# EAGLE board Index Registers - 1.1 (EAGLE 9.6.2), part 1 of 2
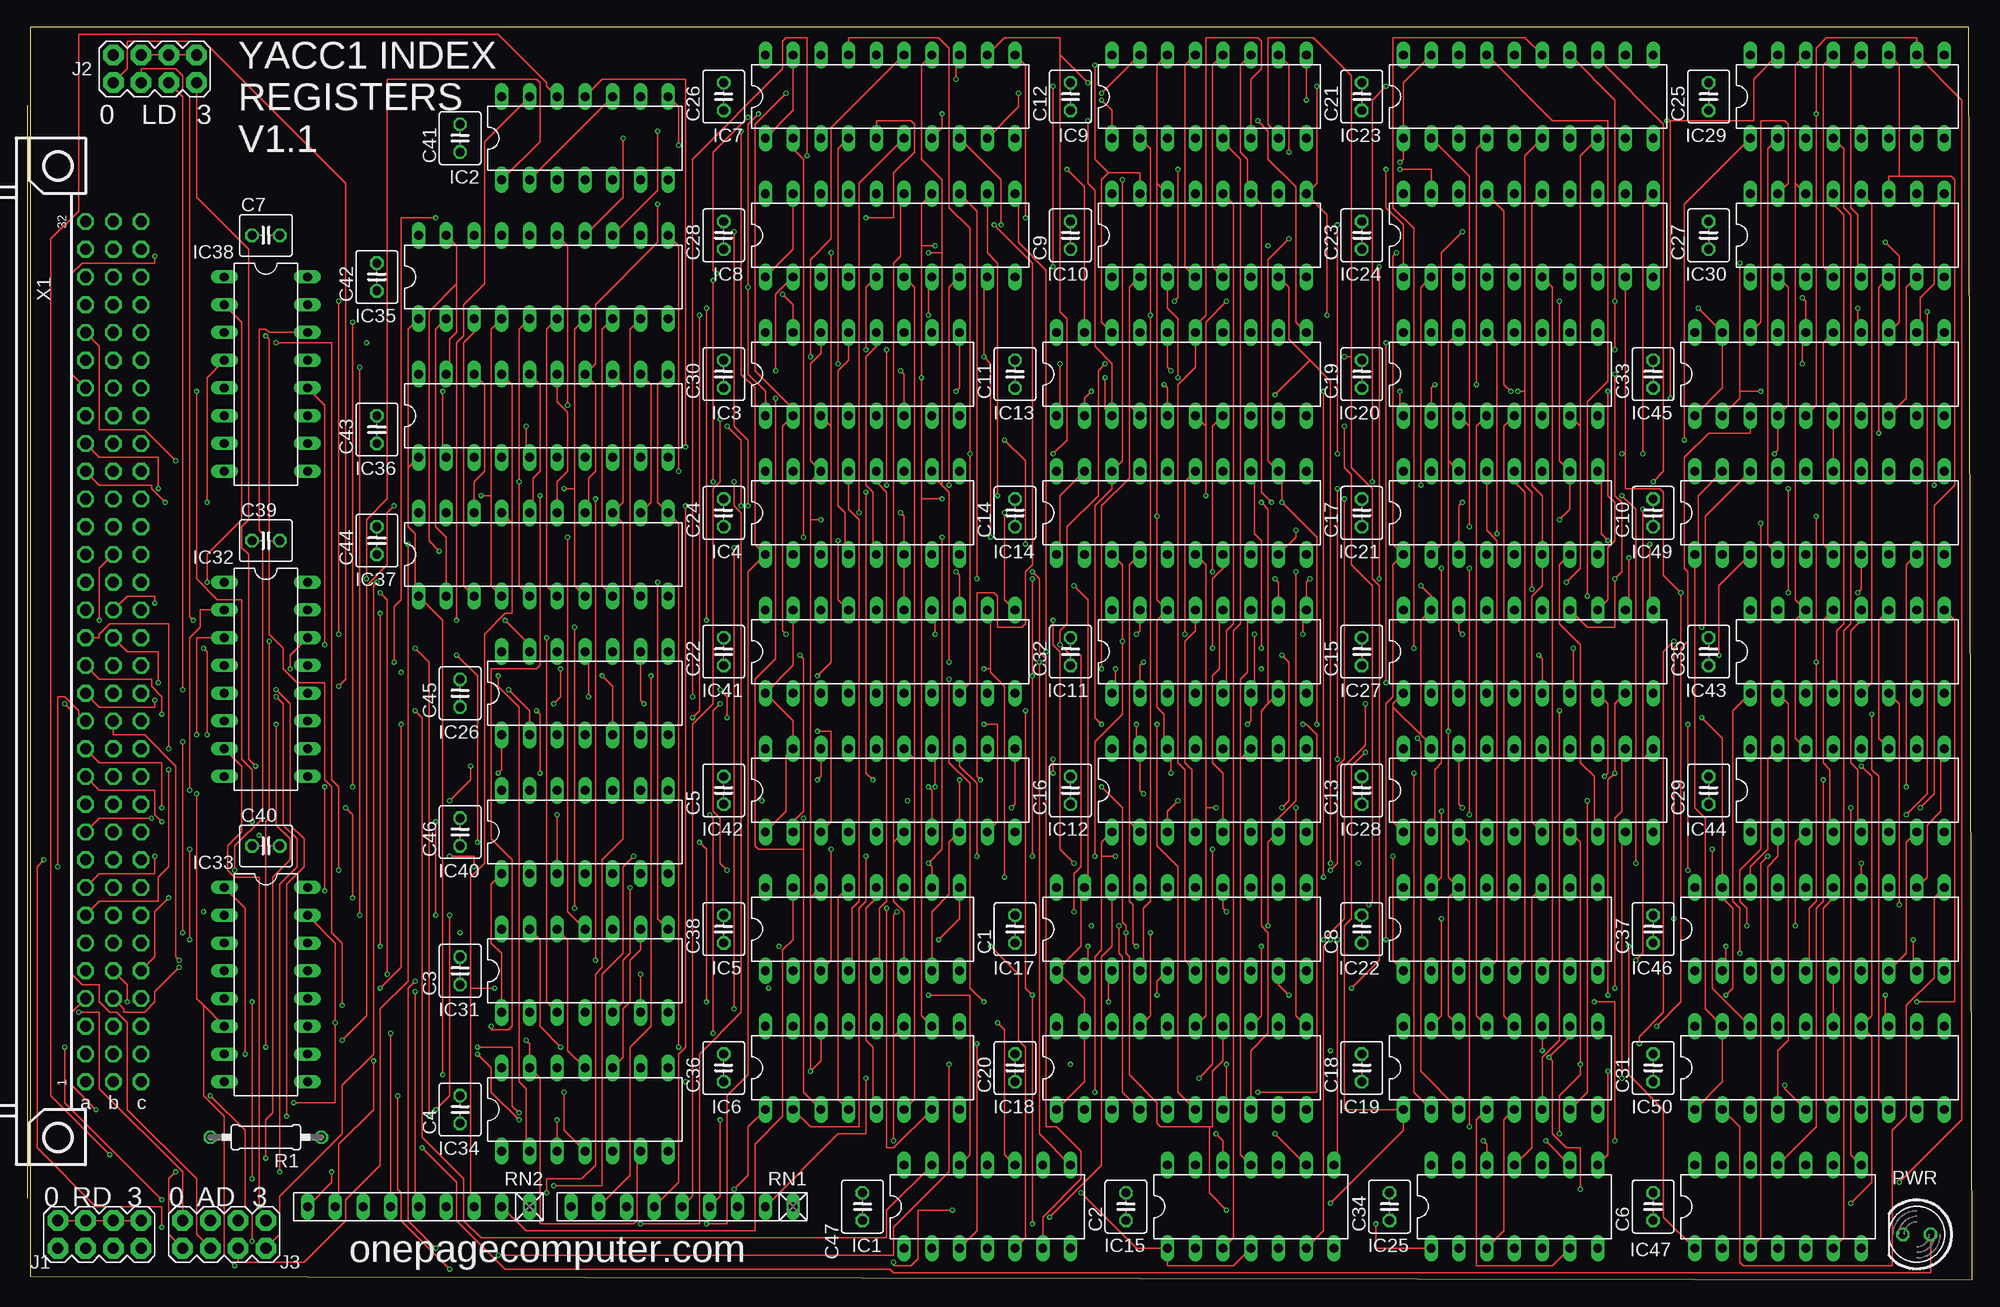
[diagram p0: board, top side]
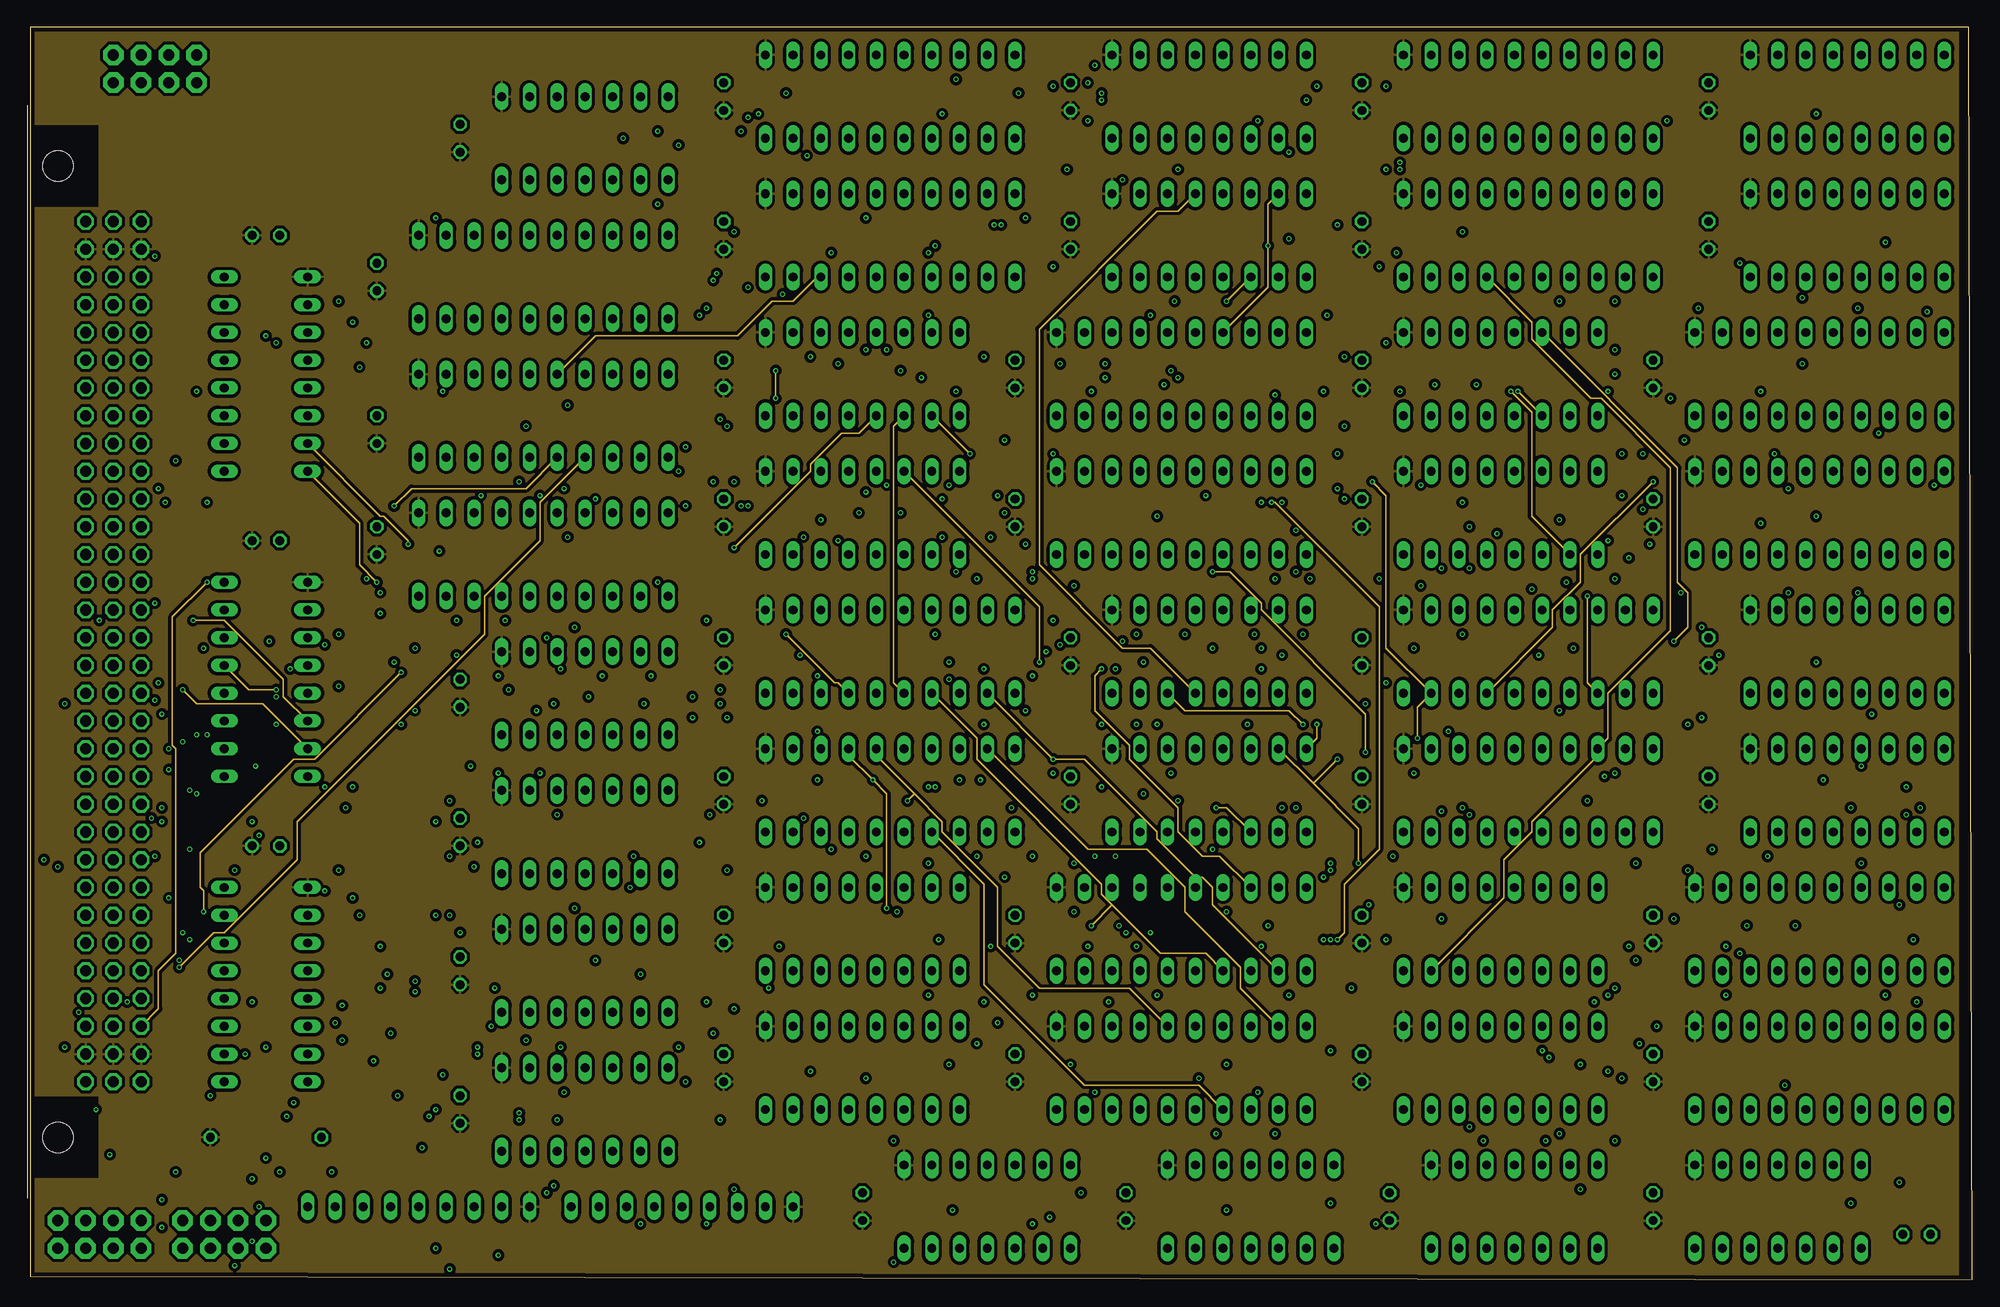
[diagram p1: board, inner layer Route2]
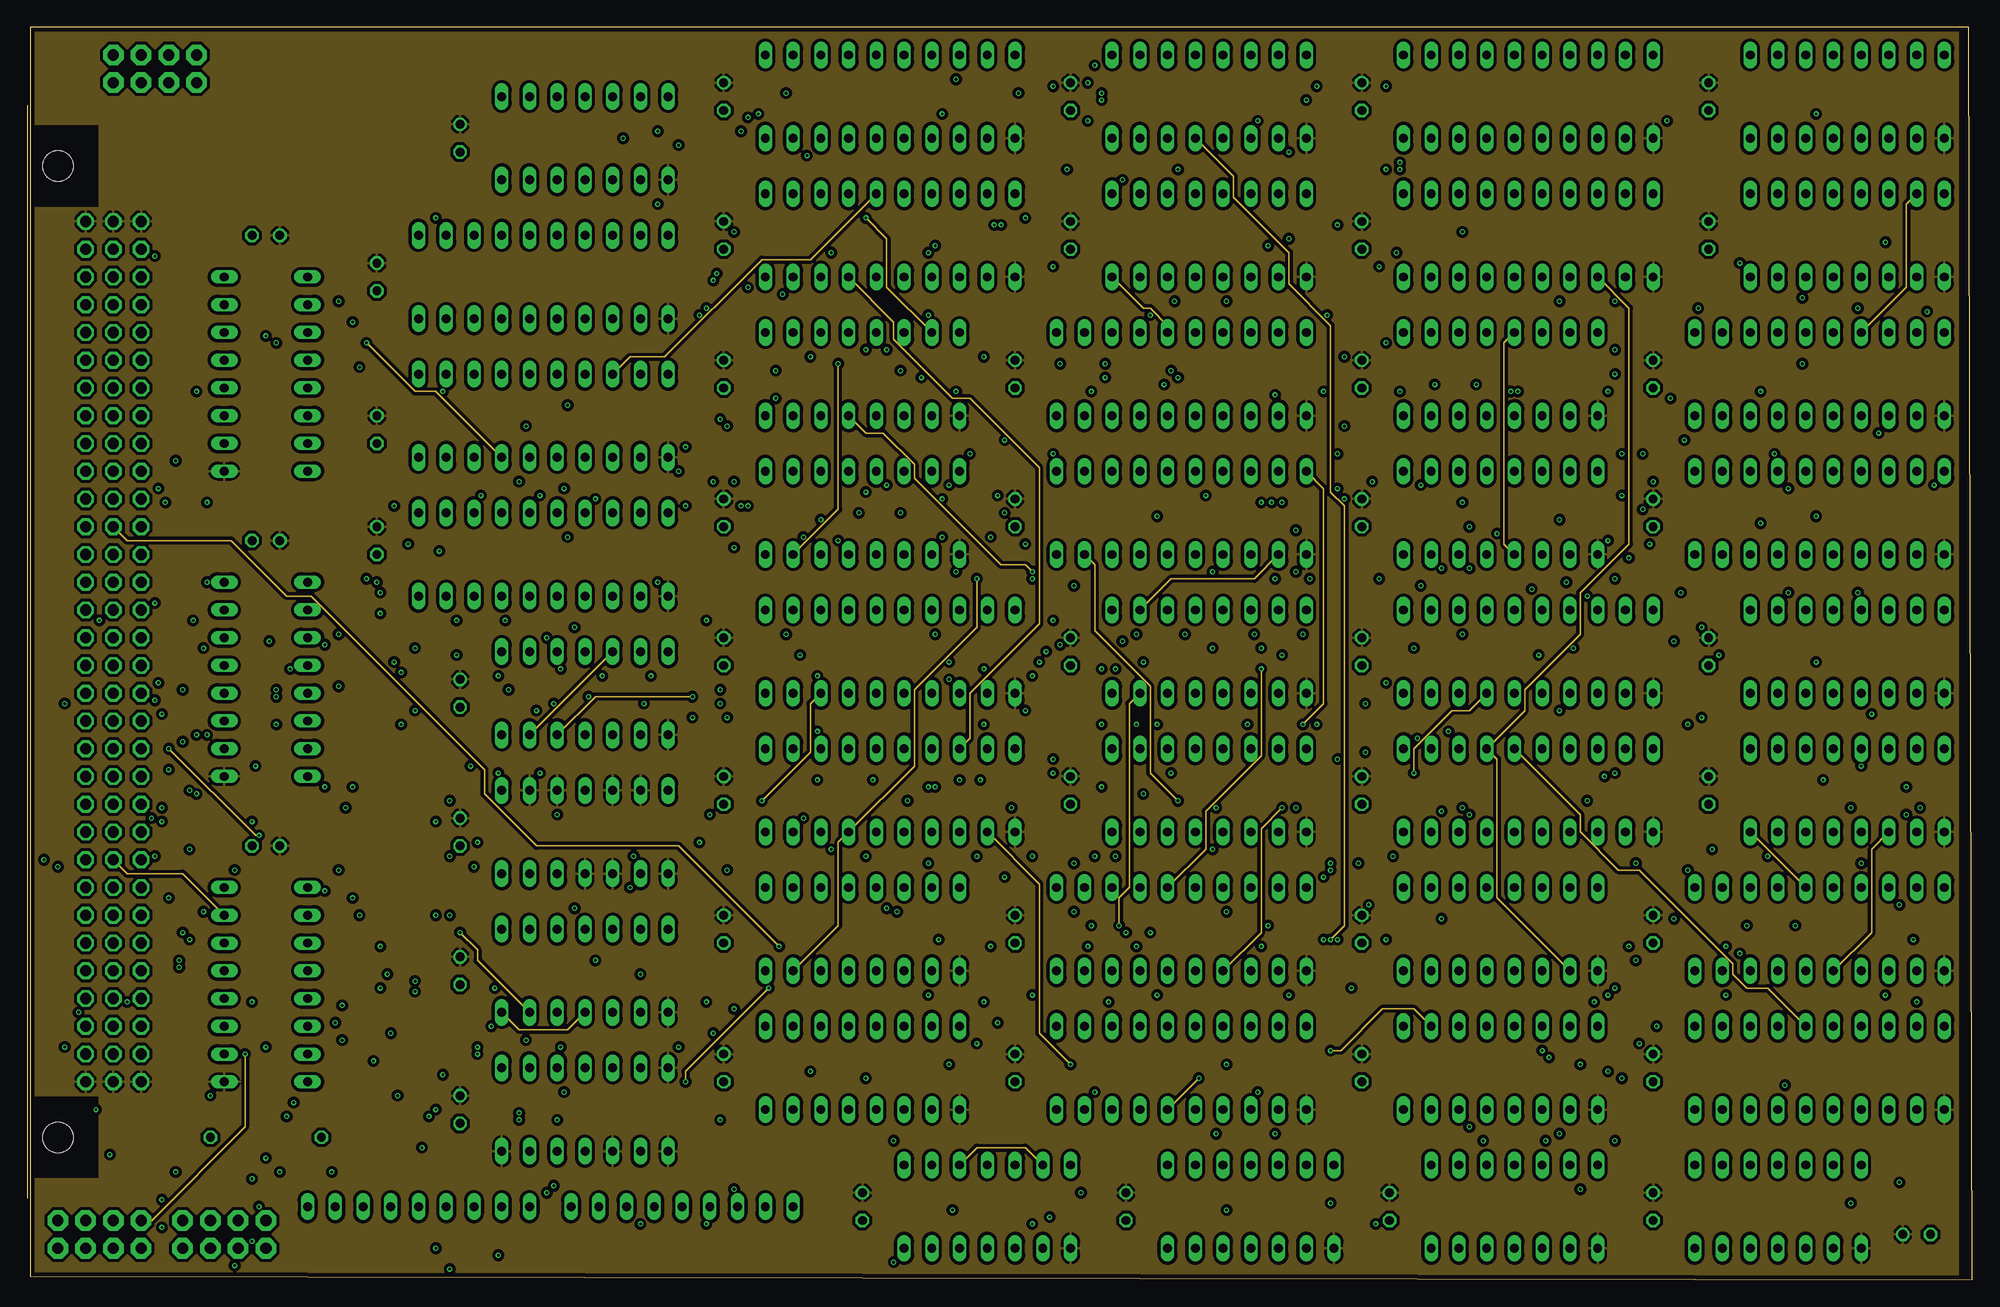
[diagram p2: board, inner layer Route15]
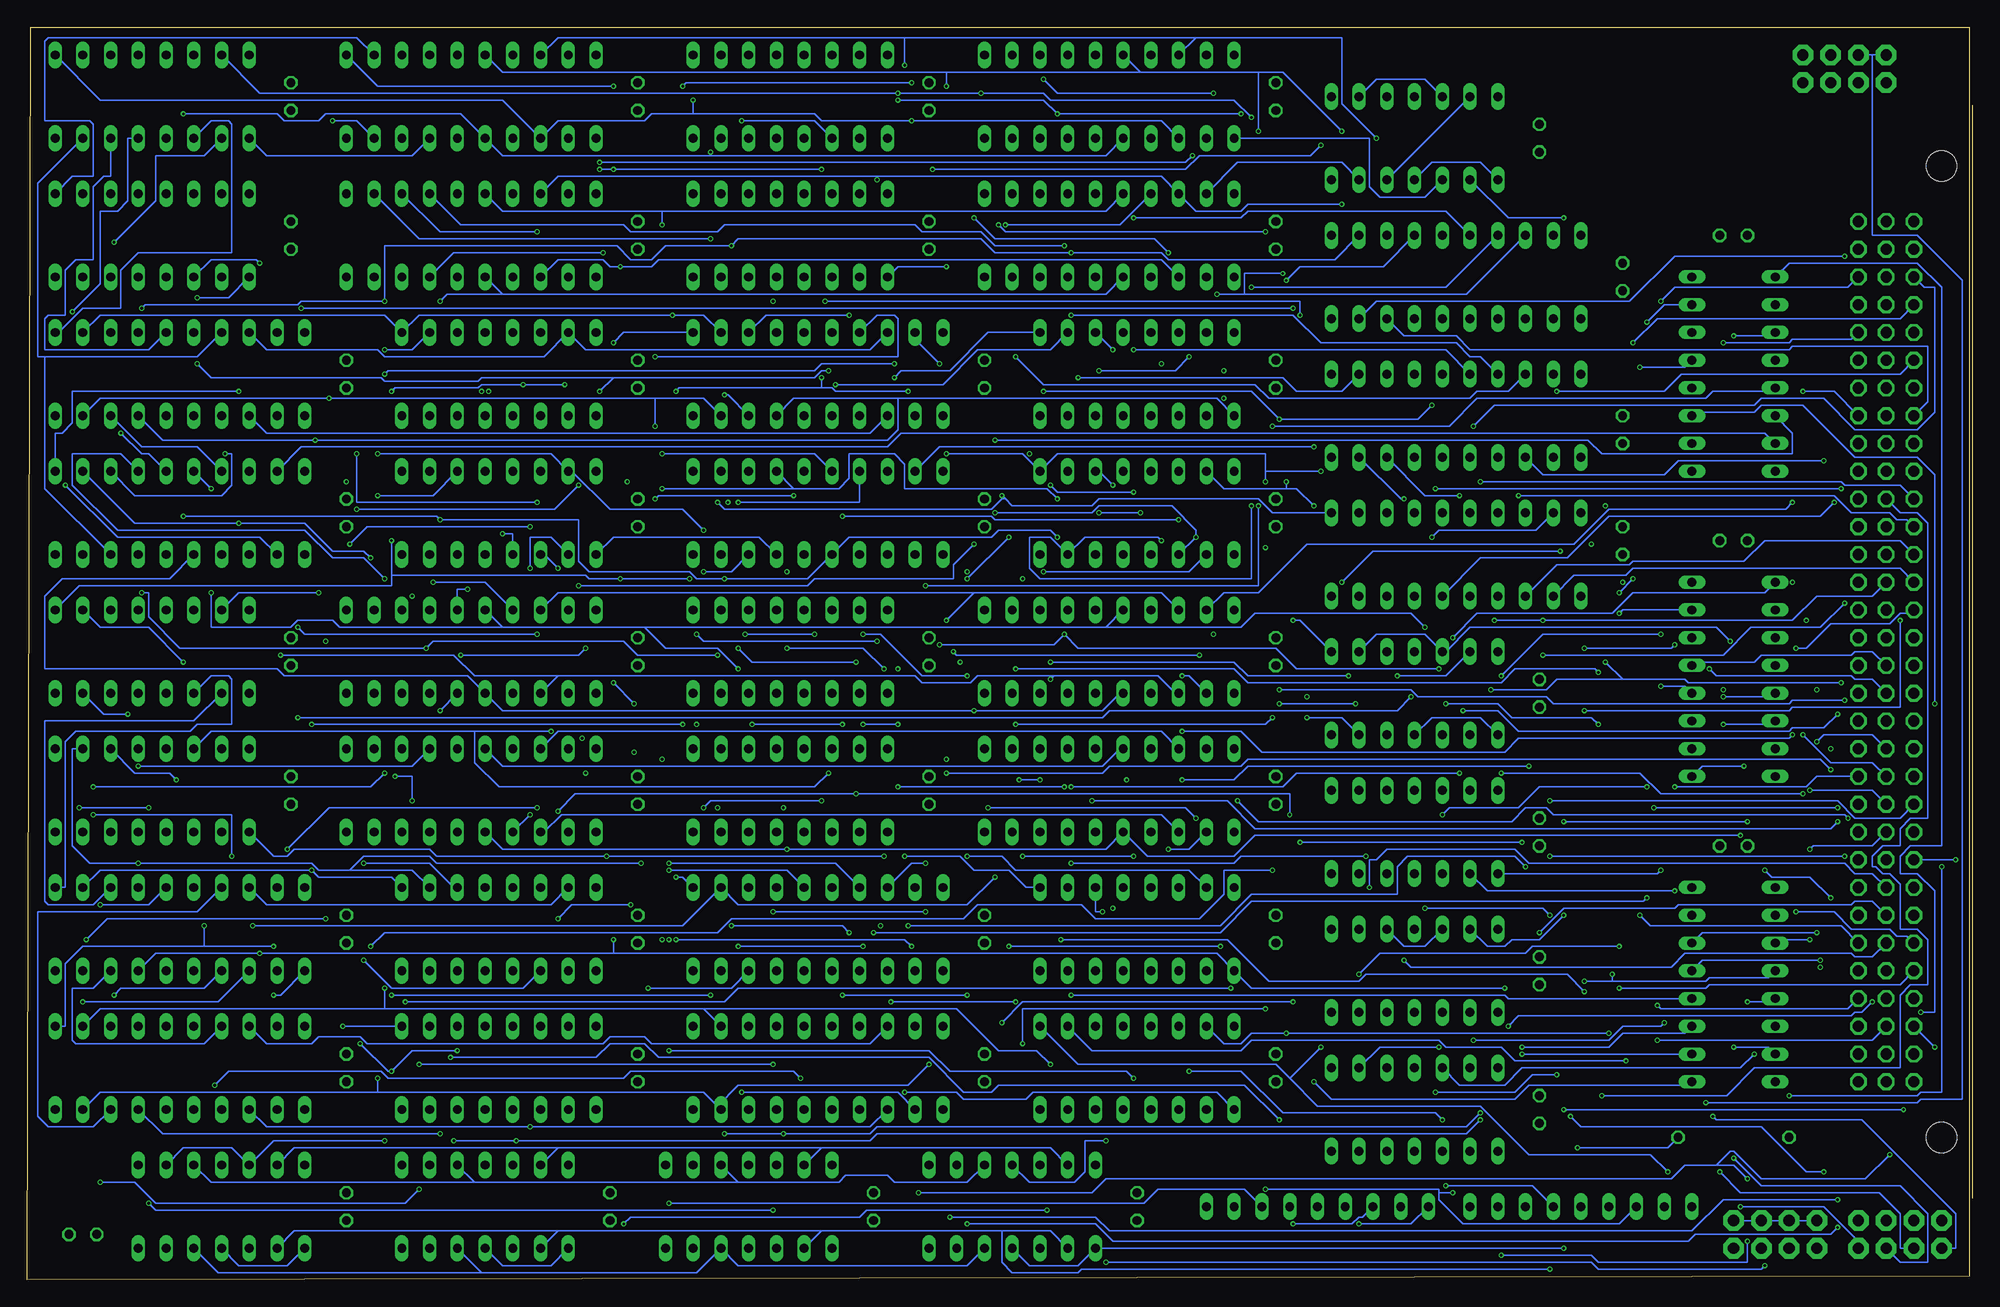
[diagram p3: board, bottom side, seen from below]

Size 177.8 x 114.62 mm. Coordinates in mm from the lower left corner, seen from the top.
Outline: 0,0.33 177.8,0 177.47,114.62 0,114.62 0,0.33
Copper layers (1*2*15*16): Top 0.035559375mm / dielectric 0.17018125mm / Route2 0.01778125mm / dielectric 47mil / Route15 0.01778125mm / dielectric 0.17018125mm / Bottom 0.035559375mm
Design rules "oshpark-4layer *": minimum track width 5mil, minimum drill 10mil, track to track 12mil, track to pad 10mil, pad to pad 5mil, via to via 5mil, smd to smd 5mil, copper to edge 15mil, drill to drill 6mil, minimum pad ring 4mil, minimum via ring 4mil, stop-mask expansion 2.5mil, vias tented up to drill 0mil, thermal gap 10mil

## Footprints (pad centres in the part's own frame; a part is rotated, then mirrored left to right if it is on the bottom)
C025-040X050 = drill 0.813 octagon: 1 -1.27,0; 2 1.27,0
DIL14 = drill 0.813 long: 1 -7.62,-3.81; 2 -5.08,-3.81; 3 -2.54,-3.81; 4 0,-3.81; 5 2.54,-3.81; 6 5.08,-3.81; 7 7.62,-3.81; 8 7.62,3.81; 9 5.08,3.81; 10 2.54,3.81; 11 0,3.81; 12 -2.54,3.81; 13 -5.08,3.81; 14 -7.62,3.81
DIL16 = drill 0.813 long: 1 -8.89,-3.81; 2 -6.35,-3.81; 3 -3.81,-3.81; 4 -1.27,-3.81; 5 1.27,-3.81; 6 3.81,-3.81; 7 6.35,-3.81; 8 8.89,-3.81; 9 8.89,3.81; 10 6.35,3.81; 11 3.81,3.81; 12 1.27,3.81; 13 -1.27,3.81; 14 -3.81,3.81; 15 -6.35,3.81; 16 -8.89,3.81
DIL20 = drill 0.813 long: 1 -11.43,-3.81; 2 -8.89,-3.81; 3 -6.35,-3.81; 4 -3.81,-3.81; 5 -1.27,-3.81; 6 1.27,-3.81; 7 3.81,-3.81; 8 6.35,-3.81; 9 8.89,-3.81; 10 11.43,-3.81; 11 11.43,3.81; 12 8.89,3.81; 13 6.35,3.81; 14 3.81,3.81; 15 1.27,3.81; 16 -1.27,3.81; 17 -3.81,3.81; 18 -6.35,3.81; 19 -8.89,3.81; 20 -11.43,3.81
2X4 = drill 1.016 pad 1.88 octagon: 1 -3.81,-1.27; 2 -3.81,1.27; 3 -1.27,-1.27; 4 -1.27,1.27; 5 1.27,-1.27; 6 1.27,1.27; 7 3.81,-1.27; 8 3.81,1.27
LED5MM = drill 0.813 octagon: A -1.27,0; K 1.27,0
0207/10 = drill 0.813 octagon: 1 -5.08,0; 2 5.08,0
RN-9 = drill 0.813 long: 1 -10.16,0; 2 -7.62,0; 3 -5.08,0; 4 -2.54,0; 5 0,0; 6 2.54,0; 7 5.08,0; 8 7.62,0; 9 10.16,0
FABC96R = drill 1.016 octagon: A1 -2.54,39.37; A2 -2.54,36.83; A3 -2.54,34.29; A4 -2.54,31.75; A5 -2.54,29.21; A6 -2.54,26.67; A7 -2.54,24.13; A8 -2.54,21.59; A9 -2.54,19.05; A10 -2.54,16.51; A11 -2.54,13.97; A12 -2.54,11.43; A13 -2.54,8.89; A14 -2.54,6.35; A15 -2.54,3.81; A16 -2.54,1.27; A17 -2.54,-1.27; A18 -2.54,-3.81; A19 -2.54,-6.35; A20 -2.54,-8.89; A21 -2.54,-11.43; A22 -2.54,-13.97; A23 -2.54,-16.51; A24 -2.54,-19.05; A25 -2.54,-21.59; A26 -2.54,-24.13; A27 -2.54,-26.67; A28 -2.54,-29.21; A29 -2.54,-31.75; A30 -2.54,-34.29; A31 -2.54,-36.83; A32 -2.54,-39.37; B1 -5.08,39.37; B2 -5.08,36.83; B3 -5.08,34.29; B4 -5.08,31.75; B5 -5.08,29.21; B6 -5.08,26.67; B7 -5.08,24.13; B8 -5.08,21.59; B9 -5.08,19.05; B10 -5.08,16.51; B11 -5.08,13.97; B12 -5.08,11.43; B13 -5.08,8.89; B14 -5.08,6.35; B15 -5.08,3.81; B16 -5.08,1.27; B17 -5.08,-1.27; B18 -5.08,-3.81; B19 -5.08,-6.35; B20 -5.08,-8.89; B21 -5.08,-11.43; B22 -5.08,-13.97; B23 -5.08,-16.51; B24 -5.08,-19.05; B25 -5.08,-21.59; B26 -5.08,-24.13; B27 -5.08,-26.67; B28 -5.08,-29.21; B29 -5.08,-31.75; B30 -5.08,-34.29; B31 -5.08,-36.83; B32 -5.08,-39.37; C1 -7.62,39.37; C2 -7.62,36.83; C3 -7.62,34.29; C4 -7.62,31.75; C5 -7.62,29.21; C6 -7.62,26.67; C7 -7.62,24.13; C8 -7.62,21.59; C9 -7.62,19.05; C10 -7.62,16.51; C11 -7.62,13.97; C12 -7.62,11.43; C13 -7.62,8.89; C14 -7.62,6.35; C15 -7.62,3.81; C16 -7.62,1.27; C17 -7.62,-1.27; C18 -7.62,-3.81; C19 -7.62,-6.35; C20 -7.62,-8.89; C21 -7.62,-11.43; C22 -7.62,-13.97; C23 -7.62,-16.51; C24 -7.62,-19.05; C25 -7.62,-21.59; C26 -7.62,-24.13; C27 -7.62,-26.67; C28 -7.62,-29.21; C29 -7.62,-31.75; C30 -7.62,-34.29; C31 -7.62,-36.83; C32 -7.62,-39.37 | hole 2.794: 0,-44.456; 0,44.456

## Placement (x,y rotation side)
C1  0.1  [C025-040X050]  90.17,32.08 90 top
C2  0.1  [C025-040X050]  100.33,6.68 90 top
C3  0.1  [C025-040X050]  39.37,28.27 90 top
C4  0.1  [C025-040X050]  39.37,15.57 90 top
C5  0.1  [C025-040X050]  63.5,44.78 90 top
C6  0.1  [C025-040X050]  148.59,6.68 90 top
C7  0.1  [C025-040X050]  21.59,95.58 0 top
C8  0.1  [C025-040X050]  121.92,32.08 90 top
C9  0.1  [C025-040X050]  95.25,95.58 90 top
C10  0.1  [C025-040X050]  148.59,70.18 90 top
C11  0.1  [C025-040X050]  90.17,82.88 90 top
C12  0.1  [C025-040X050]  95.25,108.28 90 top
C13  0.1  [C025-040X050]  121.92,44.78 90 top
C14  0.1  [C025-040X050]  90.17,70.18 90 top
C15  0.1  [C025-040X050]  121.92,57.48 90 top
C16  0.1  [C025-040X050]  95.25,44.78 90 top
C17  0.1  [C025-040X050]  121.92,70.18 90 top
C18  0.1  [C025-040X050]  121.92,19.38 90 top
C19  0.1  [C025-040X050]  121.92,82.88 90 top
C20  0.1  [C025-040X050]  90.17,19.38 90 top
C21  0.1  [C025-040X050]  121.92,108.28 90 top
C22  0.1  [C025-040X050]  63.5,57.48 90 top
C23  0.1  [C025-040X050]  121.92,95.58 90 top
C24  0.1  [C025-040X050]  63.5,70.18 90 top
C25  0.1  [C025-040X050]  153.67,108.28 90 top
C26  0.1  [C025-040X050]  63.5,108.28 90 top
C27  0.1  [C025-040X050]  153.67,95.58 90 top
C28  0.1  [C025-040X050]  63.5,95.58 90 top
C29  0.1  [C025-040X050]  153.67,44.78 90 top
C30  0.1  [C025-040X050]  63.5,82.88 90 top
C31  0.1  [C025-040X050]  148.59,19.38 90 top
C32  0.1  [C025-040X050]  95.25,57.48 90 top
C33  0.1  [C025-040X050]  148.59,82.88 90 top
C34  0.1  [C025-040X050]  124.46,6.68 90 top
C35  0.1  [C025-040X050]  153.67,57.48 90 top
C36  0.1  [C025-040X050]  63.5,19.38 90 top
C37  0.1  [C025-040X050]  148.59,32.08 90 top
C38  0.1  [C025-040X050]  63.5,32.08 90 top
C39  0.1  [C025-040X050]  21.59,67.64 0 top
C40  0.1  [C025-040X050]  21.59,39.7 0 top
C41  0.1  [C025-040X050]  39.37,104.47 90 top
C42  0.1  [C025-040X050]  31.75,91.77 90 top
C43  0.1  [C025-040X050]  31.75,77.8 90 top
C44  0.1  [C025-040X050]  31.75,67.64 90 top
C45  0.1  [C025-040X050]  39.37,53.67 90 top
C46  0.1  [C025-040X050]  39.37,40.97 90 top
C47  0.1  [C025-040X050]  76.2,6.68 90 top
IC1  74LS32N  [DIL14]  87.63,6.68 0 top
IC2  74LS32N  [DIL14]  50.8,104.47 0 top
IC3  74LS192N  [DIL16]  76.2,82.88 0 top
IC4  74LS192N  [DIL16]  76.2,70.18 0 top
IC5  74LS192N  [DIL16]  76.2,32.08 0 top
IC6  74LS192N  [DIL16]  76.2,19.38 0 top
IC7  74LS244N  [DIL20]  78.74,108.28 0 top
IC8  74LS244N  [DIL20]  78.74,95.58 0 top
IC9  74LS192N  [DIL16]  107.95,108.28 0 top
IC10  74LS192N  [DIL16]  107.95,95.58 0 top
IC11  74LS192N  [DIL16]  107.95,57.48 0 top
IC12  74LS192N  [DIL16]  107.95,44.78 0 top
IC13  74LS244N  [DIL20]  105.41,82.88 0 top
IC14  74LS244N  [DIL20]  105.41,70.18 0 top
IC15  74LS32N  [DIL14]  111.76,6.68 0 top
IC17  74LS244N  [DIL20]  105.41,32.08 0 top
IC18  74LS244N  [DIL20]  105.41,19.38 0 top
IC19  74LS192N  [DIL16]  134.62,19.38 0 top
IC20  74LS192N  [DIL16]  134.62,82.88 0 top
IC21  74LS192N  [DIL16]  134.62,70.18 0 top
IC22  74LS192N  [DIL16]  134.62,32.08 0 top
IC23  74LS244N  [DIL20]  137.16,108.28 0 top
IC24  74LS244N  [DIL20]  137.16,95.58 0 top
IC25  74LS32N  [DIL14]  135.89,6.68 0 top
IC26  74LS32N  [DIL14]  50.8,53.67 0 top
IC27  74LS244N  [DIL20]  137.16,57.48 0 top
IC28  74LS244N  [DIL20]  137.16,44.78 0 top
IC29  74LS192N  [DIL16]  166.37,108.28 0 top
IC30  74LS192N  [DIL16]  166.37,95.58 0 top
IC31  74LS32N  [DIL14]  50.8,28.27 0 top
IC32  74LS139N  [DIL16]  21.59,54.94 270 top
IC33  74LS139N  [DIL16]  21.59,27 270 top
IC34  4077N  [DIL14]  50.8,15.57 0 top
IC35  74LS245N  [DIL20]  46.99,91.77 0 top
IC36  74LS245N  [DIL20]  46.99,79.07 0 top
IC37  74LS245N  [DIL20]  46.99,66.37 0 top
IC38  74LS139N  [DIL16]  21.59,82.88 270 top
IC40  74LS32N  [DIL14]  50.8,40.97 0 top
IC41  74LS244N  [DIL20]  78.74,57.48 0 top
IC42  74LS244N  [DIL20]  78.74,44.78 0 top
IC43  74LS192N  [DIL16]  166.37,57.48 0 top
IC44  74LS192N  [DIL16]  166.37,44.78 0 top
IC45  74LS244N  [DIL20]  163.83,82.88 0 top
IC46  74LS244N  [DIL20]  163.83,32.08 0 top
IC47  74LS32N  [DIL14]  160.02,6.68 0 top
IC49  74LS244N  [DIL20]  163.83,70.18 0 top
IC50  74LS244N  [DIL20]  163.83,19.38 0 top
J1  [2X4]  6.35,4.14 0 top
J2  [2X4]  11.43,110.82 0 top
J3  [2X4]  17.78,4.14 0 top
PWR  [LED5MM]  172.72,4.14 180 top
R1  330  [0207/10]  21.59,13.03 180 top
RN1  10k  [RN-9]  59.69,6.68 180 top
RN2  10k  [RN-9]  35.56,6.68 180 top
X1  FABC96R  [FABC96R]  2.54,57.48 180 top

## Library data of the parts
C1-C47 = resistor
IC1-IC15 IC17-IC33 IC35-IC38 IC40-IC47 IC49 IC50 = 74xx-us
IC34 = 40xx
J1-J3 = SparkFun-Connectors
PWR = led
R1 = eagle-ltspice; SPICEMODEL: NONE; SPICEPREFIX: R
RN1 RN2 = resistor-net; OC_FARNELL: unknown; OC_NEWARK: unknown
X1 = con-vg

## Nets
-AC-LD: X1.C22
-AC-LD-INV: X1.C20
-AC-RD: X1.C21
-ADDRSEL: IC38.1 J3.2 J3.4 J3.6 J3.8
-ALU-FUNC: X1.C15
-ARD0: IC38.12 J3.1
-BUS-EN: IC31.1 IC31.4 IC40.1 X1.C28
-HL-SWAP: IC31.13 IC34.9 X1.C25
-INT: X1.C13
-INTA: X1.C14
-IO-ADDR-LD: X1.C11
-IO-RD: X1.B25
-IO-WR: X1.B26
-LDSEL: IC33.15 IC34.6 IC34.13 J2.2 J2.4 J2.6 J2.8
-MEM-RD: X1.B23
-MEM-WR: X1.B24
-R0-ADDRSEL: IC38.4 IC41.1 IC41.19 IC42.1 IC42.19
-R0-LDSEL: IC1.9 IC1.12 IC33.12
-R0-RDSEL: IC1.1 IC1.4 IC2.1 IC2.4 IC33.4
-R1-ADDRSEL: IC17.1 IC17.19 IC18.1 IC18.19 IC38.5
-R1-LDSEL: IC15.9 IC15.12 IC33.11
-R1-RDSEL: IC2.9 IC2.12 IC15.1 IC15.4 IC33.5
-R2-ADDRSEL: IC27.1 IC27.19 IC28.1 IC28.19 IC38.6
-R2-LDSEL: IC25.9 IC25.12 IC33.10
-R2-RDSEL: IC25.1 IC25.4 IC26.1 IC26.4 IC33.6
-R3-ADDRSEL: IC38.7 IC49.1 IC49.19 IC50.1 IC50.19
-R3-LDSEL: IC33.9 IC47.9 IC47.12
-R3-RDSEL: IC26.9 IC26.12 IC33.7 IC47.1 IC47.4
-RDSEL: IC33.1 IC34.12 J1.2 J1.4 J1.6 J1.8
-REG-DN: IC1.5 IC15.5 IC25.5 IC47.5 X1.B21
-REG-FUNC-LD: IC31.5 X1.B8
-REG-FUNC-RD: IC31.2 X1.B7
-REG-LD-HI: IC1.13 IC15.13 IC25.13 IC47.13 X1.B20
-REG-LD-LO: IC1.10 IC15.10 IC25.10 IC47.10 X1.B18
-REG-RD-HI: IC2.5 IC2.13 IC26.5 IC26.13 X1.B19
-REG-RD-LO: IC2.2 IC2.10 IC26.2 IC26.10 X1.B17
-REG-UP: IC1.2 IC15.2 IC25.2 IC47.2 X1.B22
-RESET: IC34.2 X1.C30
-RLD0: IC32.12 J2.1
-RRD0: IC32.4 J1.1
-RUN: X1.C29
-SR-LD: X1.C23
-TMP-REG-LD0: X1.B28
-TMP-REG-LD1: X1.B30
-TMP-REG-RD0: X1.B27
-TMP-REG-RD1: X1.B29
-VMA: IC40.2 X1.C12
ADATA0: IC3.15 IC7.9 IC9.15 IC13.9 IC19.15 IC23.9 IC29.15 IC35.18 IC45.9 RN1.2
ADATA1: IC3.1 IC7.7 IC9.1 IC13.7 IC19.1 IC23.7 IC29.1 IC35.17 IC45.7 RN1.3
ADATA2: IC3.10 IC7.5 IC9.10 IC13.5 IC19.10 IC23.5 IC29.10 IC35.16 IC45.5 RN1.4
ADATA3: IC3.9 IC7.3 IC9.9 IC13.3 IC19.9 IC23.3 IC29.9 IC35.15 IC45.3 RN1.5
ADATA4: IC4.15 IC7.18 IC10.15 IC13.18 IC20.15 IC23.18 IC30.15 IC35.14 IC45.18 RN1.6
ADATA5: IC4.1 IC7.16 IC10.1 IC13.16 IC20.1 IC23.16 IC30.1 IC35.13 IC45.16 RN1.7
ADATA6: IC4.10 IC7.14 IC10.10 IC13.14 IC20.10 IC23.14 IC30.10 IC35.12 IC45.14 RN1.8
ADATA7: IC4.9 IC7.12 IC10.9 IC13.12 IC20.9 IC23.12 IC30.9 IC35.11 IC45.12 RN1.9
ADATA8: IC5.15 IC8.9 IC11.15 IC14.9 IC21.15 IC24.9 IC36.18 IC37.18 IC43.15 IC46.9 RN2.2
ADATA9: IC5.1 IC8.7 IC11.1 IC14.7 IC21.1 IC24.7 IC36.17 IC37.17 IC43.1 IC46.7 RN2.3
ADATA10: IC5.10 IC8.5 IC11.10 IC14.5 IC21.10 IC24.5 IC36.16 IC37.16 IC43.10 IC46.5 RN2.4
ADATA11: IC5.9 IC8.3 IC11.9 IC14.3 IC21.9 IC24.3 IC36.15 IC37.15 IC43.9 IC46.3 RN2.5
ADATA12: IC6.15 IC8.18 IC12.15 IC14.18 IC22.15 IC24.18 IC36.14 IC37.14 IC44.15 IC46.18 RN2.6
ADATA13: IC6.1 IC8.16 IC12.1 IC14.16 IC22.1 IC24.16 IC36.13 IC37.13 IC44.1 IC46.16 RN2.7
ADATA14: IC6.10 IC8.14 IC12.10 IC14.14 IC22.10 IC24.14 IC36.12 IC37.12 IC44.10 IC46.14 RN2.8
ADATA15: IC6.9 IC8.12 IC12.9 IC14.12 IC22.9 IC24.12 IC36.11 IC37.11 IC44.9 IC46.12 RN2.9
ADDR0: IC17.18 IC27.18 IC41.18 IC49.18 X1.A3
ADDR1: IC17.16 IC27.16 IC41.16 IC49.16 X1.A4
ADDR2: IC17.14 IC27.14 IC41.14 IC49.14 X1.A5
ADDR3: IC17.12 IC27.12 IC41.12 IC49.12 X1.A6
ADDR4: IC17.9 IC27.9 IC41.9 IC49.9 X1.A7
ADDR5: IC17.7 IC27.7 IC41.7 IC49.7 X1.A8
ADDR6: IC17.5 IC27.5 IC41.5 IC49.5 X1.A9
ADDR7: IC17.3 IC27.3 IC41.3 IC49.3 X1.A10
ADDR8: IC18.18 IC28.18 IC42.18 IC50.18 X1.A11
ADDR9: IC18.16 IC28.16 IC42.16 IC50.16 X1.A12
ADDR10: IC18.14 IC28.14 IC42.14 IC50.14 X1.A13
ADDR11: IC18.12 IC28.12 IC42.12 IC50.12 X1.A14
ADDR12: IC18.9 IC28.9 IC42.9 IC50.9 X1.A15
ADDR13: IC18.7 IC28.7 IC42.7 IC50.7 X1.A16
ADDR14: IC18.5 IC28.5 IC42.5 IC50.5 X1.A17
ADDR15: IC18.3 IC28.3 IC42.3 IC50.3 X1.A18
ADDR-REG-ID0: IC38.2 X1.C3
ADDR-REG-ID1: IC38.3 X1.C4
ADDR-REG-ID2: IC38.14 X1.C5
ADDR-REG-ID3: IC38.13 X1.C6
ALU0: X1.C16
ALU1: X1.C17
ALU2: X1.C18
ALU3: X1.C19
BR-COND: X1.C24
BUS-DIR: IC34.4 IC35.1 IC36.1 IC37.1
DATA0: IC35.2 IC37.2 X1.A19
DATA1: IC35.3 IC37.3 X1.A20
DATA2: IC35.4 IC37.4 X1.A21
DATA3: IC35.5 IC37.5 X1.A22
DATA4: IC35.6 IC37.6 X1.A23
DATA5: IC35.7 IC37.7 X1.A24
DATA6: IC35.8 IC37.8 X1.A25
DATA7: IC35.9 IC37.9 X1.A26
DATA8: IC36.2 X1.A27
DATA9: IC36.3 X1.A28
DATA10: IC36.4 X1.A29
DATA11: IC36.5 X1.A30
DATA12: IC36.6 X1.B3
DATA13: IC36.7 X1.B4
DATA14: IC36.8 X1.B5
DATA15: IC36.9 X1.B6
GND: C1.2 C2.2 C3.2 C4.2 C5.2 C6.2 C7.2 C8.2 C9.2 C10.2 C11.2 C12.2 C13.2 C14.2 C15.2 C16.2 C17.2 C18.2 C19.2 C20.2 C21.2 C22.2 C23.2 C24.2 C25.2 C26.2 C27.2 C28.2 C29.2 C30.2 C31.2 C32.2 C33.2 C34.2 C35.2 C36.2 C37.2 C38.2 C39.2 C40.2 C41.2 C42.2 C43.2 C44.2 C45.2 C46.2 C47.2 IC1.7 IC2.7 IC3.8 IC4.8 IC5.8 IC6.8 IC7.10 IC8.10 IC9.8 IC10.8 IC11.8 IC12.8 IC13.10 IC14.10 IC15.7 IC17.10 IC18.10 IC19.8 IC20.8 IC21.8 IC22.8 IC23.10 IC24.10 IC25.7 IC26.7 IC27.10 IC28.10 IC29.8 IC30.8 IC31.7 IC32.8 IC33.8 IC34.1 IC34.5 IC34.7 IC34.8 IC35.10 IC36.10 IC37.10 IC38.8 IC40.4 IC40.5 IC40.7 IC40.9 IC40.10 IC40.12 IC40.13 IC41.10 IC42.10 IC43.8 IC44.8 IC45.10 IC46.10 IC47.7 IC49.10 IC50.10 PWR.K X1.A1 X1.A32 X1.B1 X1.B32 X1.C1 X1.C32
IN: X1.C26
IOADDR0: X1.C7
IOADDR1: X1.C8
IOADDR2: X1.C9
IOADDR3: X1.C10
N$1: IC31.8 IC35.19 IC36.19
N$2: IC9.13 IC10.4
N$3: IC9.12 IC10.5
N$4: IC10.13 IC11.4
N$5: IC10.12 IC11.5
N$6: IC11.13 IC12.4
N$7: IC11.12 IC12.5
N$8: IC9.11 IC10.11 IC15.8
N$9: IC9.5 IC15.3
N$10: IC3.13 IC4.4
N$11: IC3.12 IC4.5
N$12: IC4.13 IC5.4
N$13: IC4.12 IC5.5
N$14: IC5.13 IC6.4
N$15: IC5.12 IC6.5
N$16: IC1.8 IC3.11 IC4.11
N$17: IC1.3 IC3.5
N$18: IC1.6 IC3.4
N$19: IC31.3 IC32.1
N$20: IC2.3 IC7.1 IC7.19
N$21: IC2.6 IC8.1 IC8.19
N$22: IC1.11 IC5.11 IC6.11
N$23: IC9.4 IC15.6
N$24: IC31.6 IC32.15
N$25: IC2.8 IC13.1 IC13.19
N$26: IC2.11 IC14.1 IC14.19
N$27: IC11.11 IC12.11 IC15.11
N$28: IC9.3 IC13.11 IC17.2
N$29: IC9.2 IC13.13 IC17.4
N$30: IC9.6 IC13.15 IC17.6
N$31: IC9.7 IC13.17 IC17.8
N$32: IC10.3 IC13.2 IC17.11
N$33: IC10.2 IC13.4 IC17.13
N$34: IC10.6 IC13.6 IC17.15
N$35: IC10.7 IC13.8 IC17.17
N$36: IC11.3 IC14.11 IC18.2
N$37: IC31.11 IC37.19
N$38: IC11.2 IC14.13 IC18.4
N$39: IC11.6 IC14.15 IC18.6
N$40: IC11.7 IC14.17 IC18.8
N$41: IC31.9 IC34.10
N$42: IC31.10 IC31.12 IC34.11
N$43: IC32.5 J1.3
N$44: PWR.A R1.1
N$45: IC38.15 IC40.3
N$46: IC32.6 J1.5
N$47: IC32.7 J1.7
N$48: IC32.11 J2.3
N$49: IC32.10 J2.5
N$50: IC32.9 J2.7
N$51: IC38.11 J3.3
N$52: IC38.10 J3.5
N$53: IC38.9 J3.7
N$54: IC12.3 IC14.2 IC18.11
N$55: IC12.2 IC14.4 IC18.13
N$56: IC12.6 IC14.6 IC18.15
N$57: IC12.7 IC14.8 IC18.17
N$58: IC19.13 IC20.4
N$59: IC19.12 IC20.5
N$60: IC20.13 IC21.4
N$61: IC20.12 IC21.5
N$62: IC21.13 IC22.4
N$63: IC21.12 IC22.5
N$64: IC19.11 IC20.11 IC25.8
N$65: IC19.5 IC25.3
N$66: IC19.4 IC25.6
N$67: IC23.1 IC23.19 IC26.3
N$68: IC24.1 IC24.19 IC26.6
N$69: IC21.11 IC22.11 IC25.11
N$70: IC19.3 IC23.11 IC27.2
N$71: IC19.2 IC23.13 IC27.4
N$72: IC19.6 IC23.15 IC27.6
N$73: IC19.7 IC23.17 IC27.8
N$74: IC20.3 IC23.2 IC27.11
N$75: IC20.2 IC23.4 IC27.13
N$76: IC20.6 IC23.6 IC27.15
N$77: IC20.7 IC23.8 IC27.17
N$78: IC21.3 IC24.11 IC28.2
N$79: IC21.2 IC24.13 IC28.4
N$80: IC21.6 IC24.15 IC28.6
N$81: IC21.7 IC24.17 IC28.8
N$82: IC22.3 IC24.2 IC28.11
N$83: IC22.2 IC24.4 IC28.13
N$84: IC22.6 IC24.6 IC28.15
N$85: IC22.7 IC24.8 IC28.17
N$86: IC29.13 IC30.4
N$87: IC29.12 IC30.5
N$88: IC30.13 IC43.4
N$89: IC30.12 IC43.5
N$90: IC43.13 IC44.4
N$91: IC43.12 IC44.5
N$92: IC29.11 IC30.11 IC47.8
N$93: IC29.5 IC47.3
N$94: IC29.4 IC47.6
N$95: IC26.8 IC45.1 IC45.19
N$96: IC26.11 IC46.1 IC46.19
N$97: IC43.11 IC44.11 IC47.11
N$98: IC29.3 IC45.11 IC49.2
N$99: IC29.2 IC45.13 IC49.4
N$100: IC29.6 IC45.15 IC49.6
N$101: IC29.7 IC45.17 IC49.8
N$102: IC30.3 IC45.2 IC49.11
N$103: IC30.2 IC45.4 IC49.13
N$104: IC30.6 IC45.6 IC49.15
N$105: IC30.7 IC45.8 IC49.17
N$106: IC43.3 IC46.11 IC50.2
N$107: IC43.2 IC46.13 IC50.4
N$108: IC43.6 IC46.15 IC50.6
N$109: IC43.7 IC46.17 IC50.8
N$110: IC44.3 IC46.2 IC50.11
N$111: IC44.2 IC46.4 IC50.13
N$112: IC44.6 IC46.6 IC50.15
N$113: IC44.7 IC46.8 IC50.17
N$115: IC3.3 IC7.11 IC41.2
N$116: IC3.2 IC7.13 IC41.4
N$117: IC3.6 IC7.15 IC41.6
N$118: IC3.7 IC7.17 IC41.8
N$119: IC4.3 IC7.2 IC41.11
N$120: IC4.2 IC7.4 IC41.13
N$121: IC4.6 IC7.6 IC41.15
N$122: IC4.7 IC7.8 IC41.17
N$123: IC5.3 IC8.11 IC42.2
N$124: IC5.2 IC8.13 IC42.4
N$125: IC5.6 IC8.15 IC42.6
N$126: IC5.7 IC8.17 IC42.8
N$127: IC6.3 IC8.2 IC42.11
N$128: IC6.2 IC8.4 IC42.13
N$129: IC6.6 IC8.6 IC42.15
N$130: IC6.7 IC8.8 IC42.17
OUT: X1.C27
REG-LD-ID0: IC33.14 X1.B13
REG-LD-ID1: IC33.13 X1.B14
REG-LD-ID2: IC32.14 X1.B15
REG-LD-ID3: IC32.13 X1.B16
REG-RD-ID0: IC33.2 X1.B9
REG-RD-ID1: IC33.3 X1.B10
REG-RD-ID2: IC32.2 X1.B11
REG-RD-ID3: IC32.3 X1.B12
RESET: IC3.14 IC4.14 IC5.14 IC6.14 IC9.14 IC10.14 IC11.14 IC12.14 IC19.14 IC20.14 IC21.14 IC22.14 IC29.14 IC30.14 IC34.3 IC43.14 IC44.14
VCC: C1.1 C2.1 C3.1 C4.1 C5.1 C6.1 C7.1 C8.1 C9.1 C10.1 C11.1 C12.1 C13.1 C14.1 C15.1 C16.1 C17.1 C18.1 C19.1 C20.1 C21.1 C22.1 C23.1 C24.1 C25.1 C26.1 C27.1 C28.1 C29.1 C30.1 C31.1 C32.1 C33.1 C34.1 C35.1 C36.1 C37.1 C38.1 C39.1 C40.1 C41.1 C42.1 C43.1 C44.1 C45.1 C46.1 C47.1 IC1.14 IC2.14 IC3.16 IC4.16 IC5.16 IC6.16 IC7.20 IC8.20 IC9.16 IC10.16 IC11.16 IC12.16 IC13.20 IC14.20 IC15.14 IC17.20 IC18.20 IC19.16 IC20.16 IC21.16 IC22.16 IC23.20 IC24.20 IC25.14 IC26.14 IC27.20 IC28.20 IC29.16 IC30.16 IC31.14 IC32.16 IC33.16 IC34.14 IC35.20 IC36.20 IC37.20 IC38.16 IC40.14 IC41.20 IC42.20 IC43.16 IC44.16 IC45.20 IC46.20 IC47.14 IC49.20 IC50.20 R1.2 RN1.1 RN2.1 X1.A2 X1.A31 X1.B2 X1.B31 X1.C2 X1.C31

## Tracks (layer width: path | path; a pad name or v marks a point on that pad's centre or on a via)
-ADDRSEL  (via drill 0.25)
  Top 0.127: v4.45,24.46 6.35,24.46 6.35,17.47 13.97,9.86 J3.2
  Bottom 0.127: IC38.1 16.51,93.04 4.76,93.04 2.54,90.82 2.54,39.7 5.4,39.7 6.35,38.75 6.35,37.16 4.76,37.16 3.17,35.57 3.17,24.46 v4.45,24.46 | J3.2 J3.4 J3.6 J3.8
-ARD0  (via drill 0.25)
  Top 0.127: IC38.12 26.99,80.02 v26.99,58.11 | v35.24,57.8 36.51,56.53 v36.51,14.94 | v13.34,9.86 12.7,9.22 12.7,4.14 J3.1
  Bottom 0.127: v26.99,58.11 27.3,57.8 v35.24,57.8 | v36.51,14.94 35.56,13.98 19.05,13.98 14.92,9.86 v13.34,9.86
-BUS-EN  (via drill 0.25)
  Top 0.127: IC31.1 43.18,29.86 42.23,30.81 42.23,36.21 IC40.1 | v22.54,85.74 27.62,85.74 27.62,45.73 28.26,45.1 v28.26,37.48
  Route15 0.127: IC31.4 49.21,22.87 44.77,22.87 IC31.1
  Bottom 0.127: X1.C28 10.79,86.05 16.19,86.05 16.51,85.74 v22.54,85.74 | v28.26,37.48 28.57,37.16 IC40.1
-HL-SWAP  (via drill 0.25)
  Top 0.127: v48.58,21.28 46.67,23.19 46.67,31.13 IC31.13 | v15.24,81.29 15.24,64.15 17.14,62.24 19.37,62.24 19.37,47.64 20.32,46.68 v20.32,41.92 | v37.15,33.35 v37.15,41.92
  Bottom 0.127: IC34.9 53.98,21.28 v48.58,21.28 | X1.C25 12.38,81.29 v15.24,81.29 | v37.15,41.92 v20.32,41.92 | v37.15,33.35 39.37,31.13 41.91,31.13 42.55,30.49 44.13,30.49 IC31.13
-LDSEL  (via drill 0.25)
  Top 0.127: J2.4 J2.6 J2.8 | IC33.15 27.94,30.81 v27.94,23.51 27.94,16.2 v24.13,16.2 | v45.4,21.92 45.72,21.6 IC34.13 46.67,18.43 46.67,5.09 55.24,5.09 55.56,5.41 55.56,11.44 IC34.6
  Bottom 0.127: J2.4 8.89,112.09 | 8.89,112.09 J2.2 | v27.94,23.51 28.26,23.19 31.75,23.19 33.02,21.92 v45.4,21.92 | 8.89,112.09 8.89,95.58 4.76,95.58 0.64,91.45 0.64,16.52 4.45,16.52 4.76,16.2 v24.13,16.2
-R0-ADDRSEL  (via drill 0.25)
  Top 0.127: IC42.1 69.22,42.88 69.22,47.95 IC42.19 69.85,51.13 IC41.1 69.85,56.21 IC41.19 | IC38.4 16.19,82.56 v16.19,71.13
  Bottom 0.127: v16.19,71.13 16.83,70.5 33.02,70.5 36.2,67.32 60.64,67.32 65.09,62.88 68.26,62.88 IC41.19
-R0-LDSEL  (via drill 0.25)
  Top 0.127: v82.23,26.05 86.04,26.05 86.04,11.44 IC1.12
  Route15 0.127: IC1.9 91.12,12.08 86.68,12.08 IC1.12
  Bottom 0.127: IC33.12 42.23,25.73 42.55,26.05 v82.23,26.05
-R0-RDSEL  (via drill 0.25)
  Top 0.127: v35.24,27.32 34.61,26.68 34.61,5.41 v37.15,2.87 | IC2.1 46.67,104.15 46.67,109.55 46.35,109.87 32.7,109.87 32.7,71.45 30.8,69.55 v30.8,64.15 | v32.07,62.88 32.7,62.24 v32.7,27.95
  Bottom 0.127: IC2.1 44.77,102.25 49.21,102.25 IC2.4 | IC1.4 86.04,1.28 81.6,1.28 IC1.1 v37.15,2.87 | IC33.4 18.41,27.63 23.81,27.63 24.13,27.32 32.7,27.32 | v35.24,27.32 32.7,27.32 | v32.07,62.88 v30.8,64.15 | 32.7,27.32 v32.7,27.95
-R1-ADDRSEL  (via drill 0.25)
  Top 0.127: IC18.1 96.52,18.11 IC18.19 96.52,25.73 IC17.1 96.2,30.49 96.2,35.57 IC17.19 96.84,36.21 96.84,62.24 v95.57,63.51 | v63.82,78.12 65.09,76.85 v65.09,70.81
  Bottom 0.127: IC38.5 18.1,81.29 23.5,81.29 24.13,80.66 45.09,80.66 47.62,78.12 v63.82,78.12 | v65.09,70.81 65.09,63.51 v95.57,63.51
-R1-LDSEL  (via drill 0.25)
  Top 0.127: v40.96,21.28 44.13,21.28 44.13,15.89 v44.77,15.25 | v108.58,13.35 109.22,12.71 IC15.12 | v113.98,13.35 IC15.9
  Bottom 0.127: IC33.11 26.04,22.55 31.75,22.55 33.02,21.28 v40.96,21.28 | v44.77,15.25 46.04,13.98 100.01,13.98 100.65,13.35 v108.58,13.35 v113.98,13.35
-R1-RDSEL  (via drill 0.25)
  Top 0.127: v20.32,9.22 v20.32,25.41 | v96.2,7.95 101.28,2.87 IC15.1 104.14,1.28 110.17,1.28 IC15.4 | IC2.12 47.31,109.23 47.31,109.55 42.86,114 4.45,114 4.45,97.8 1.91,95.26 1.91,16.84 v7.3,11.44
  Bottom 0.127: IC2.12 49.85,109.87 54.29,109.87 IC2.9 | IC33.5 18.1,25.41 v20.32,25.41 | v20.32,9.22 21.59,10.49 23.18,10.49 | 23.18,10.49 26.04,10.49 27.3,9.22 79.06,9.22 80.33,7.95 v96.2,7.95 | v7.3,11.44 9.53,9.22 19.05,9.22 21.59,11.76 21.91,11.76 23.18,10.49
-R2-ADDRSEL  (via drill 0.25)
  Top 0.127: IC28.1 124.78,41.92 124.78,52.4 | 124.78,52.4 124.78,52.72 IC27.1 | IC28.19 127.95,48.91 127.95,49.23 127.32,49.86 | 124.78,52.4 127.32,49.86 | 127.32,49.86 127.32,60.34 IC27.19 128.27,62.56 v127.32,63.51 | v89.22,76.85 91.12,74.94 v91.12,67.32
  Bottom 0.127: IC38.6 16.19,77.48 16.19,75.58 33.66,75.58 34.92,76.85 v89.22,76.85 | v91.12,67.32 93.03,65.42 93.03,64.15 105.73,64.15 106.36,63.51 v127.32,63.51
-R2-LDSEL  (via drill 0.25)
  Top 0.127: v40.96,20.65 42.23,19.38 42.23,17.16 v44.77,14.62 | v133.03,12.71 133.35,12.39 IC25.12 | v138.75,12.71 IC25.9
  Bottom 0.127: v40.96,20.65 IC33.10 | v44.77,14.62 46.04,13.35 100.01,13.35 100.65,12.71 v133.03,12.71 v138.75,12.71
-R2-RDSEL  (via drill 0.25)
  Top 0.127: 15.88,25.09 15.24,25.73 v15.24,44.46 | 15.88,25.09 IC33.6 | v42.86,46.37 43.18,46.68 IC26.1 | IC25.1 123.19,2.87 v123.19,5.09 | v84.45,6.36 81.28,6.36 81.28,1.92 80.64,1.28 79.06,1.28 v79.06,1.6 | v18.73,1.28 17.78,2.23 17.78,14.94 15.88,16.84 15.88,25.09
  Bottom 0.127: IC25.1 129.86,1.28 134.3,1.28 IC25.4 | v15.24,44.46 28.26,44.46 30.16,46.37 v42.86,46.37 | IC26.4 49.21,51.45 44.77,51.45 IC26.1 | v123.19,5.09 122.56,5.73 101.6,5.73 100.97,6.36 v84.45,6.36 | v79.06,1.6 34.61,1.6 33.97,0.97 19.05,0.97 v18.73,1.28
-R3-ADDRSEL
  Top 0.127: IC50.1 154.94,18.11 IC50.19 153.35,24.78 153.35,42.24 152.4,43.19 IC49.1 152.72,66.69 152.72,71.77 IC49.19
  Bottom 0.127: IC38.7 18.73,77.48 97.79,77.48 99.06,76.21 152.72,76.21 IC49.19
-R3-LDSEL  (via drill 0.25)
  Top 0.127: v143.19,25.41 145.1,25.41 v145.1,12.71
  Route15 0.127: v60.01,18.11 60.01,19.06 v67.63,26.68
  Bottom 0.127: IC47.9 163.51,12.08 159.07,12.08 IC47.12 155.26,12.71 v145.1,12.71 | IC33.9 25.72,17.79 40.32,17.79 41.59,16.52 58.42,16.52 v60.01,18.11 | v67.63,26.68 112.71,26.68 113.98,25.41 v143.19,25.41
-R3-RDSEL  (via drill 0.25)
  Top 0.127: v21.59,21.28 21.59,41.92 21.91,42.24 v21.91,58.43 | IC47.1 149.54,5.73 149.54,15.57 146.37,18.74 v146.37,30.49 | v63.82,37.48 63.18,38.11 63.18,42.24 62.55,42.88 62.55,52.08 v63.18,52.72 | v56.2,52.72 55.88,53.03 IC26.9
  Bottom 0.127: IC47.1 153.99,1.28 158.43,1.28 IC47.4 | IC33.7 18.41,21.28 v21.59,21.28 | v21.91,58.43 23.18,59.7 45.72,59.7 47.94,57.48 IC26.12 49.85,59.07 54.29,59.07 IC26.9 | v146.37,30.49 145.1,31.76 114.62,31.76 113.35,33.03 92.08,33.03 90.81,34.3 81.28,34.3 80.01,33.03 70.48,33.03 68.26,35.25 68.26,37.48 v63.82,37.48 | v56.2,52.72 v63.18,52.72
-RDSEL  (via drill 0.25)
  Top 0.127: J1.2 J1.4 J1.6 J1.8 | IC33.1 19.68,33.98 v19.68,20.65
  Route15 0.127: J1.8 11.11,5.41 19.68,13.98 v19.68,20.65
  Bottom 0.127: v19.68,20.65 20.95,19.38 40.96,19.38 42.55,17.79 46.67,17.79 IC34.12
-REG-DN  (via drill 0.25)
  Top 0.127: v87.95,30.49 90.49,27.95 90.49,21.92 91.12,21.28 91.12,3.82 IC1.5
  Route15 0.127: X1.B21 8.89,67.64 18.41,67.64 23.5,62.56 25.72,62.56 41.59,46.68 41.59,44.46 46.35,39.7 59.37,39.7 v68.58,30.49
  Bottom 0.127: IC1.5 91.76,1.28 112.71,1.28 IC15.5 116.52,0.65 136.21,0.65 | 136.21,0.65 IC25.5 | IC47.5 160.34,0.65 136.21,0.65 | v87.95,30.49 v68.58,30.49
-REG-FUNC-LD  (via drill 0.25)
  Top 0.127: IC31.5 54.29,25.41 54.29,29.22 54.93,29.86 v54.93,35.89
  Bottom 0.127: v54.93,35.89 54.93,38.43 54.29,38.43 53.34,39.38 41.59,39.38 40.32,38.11 11.43,38.11 10.48,37.16 8.89,37.16 X1.B8
-REG-FUNC-RD  (via drill 0.25)
  Route15 0.127: IC31.2 40.96,29.22 40.96,30.17 v39.37,31.76
  Bottom 0.127: v39.37,31.76 37.15,33.98 26.99,33.98 26.67,34.3 10.79,34.3 10.48,34.62 8.89,34.62 X1.B7
-REG-LD-HI  (via drill 0.25)
  Top 0.127: X1.B20 6.35,65.1 v6.35,60.34 | v35.24,52.08 35.88,51.45 35.88,13.03 39.69,9.22 39.69,5.41 41.27,3.82 78.42,3.82 78.42,6.36 IC1.13
  Bottom 0.127: IC1.13 84.14,12.08 105.09,12.08 | IC15.13 105.09,12.08 | 129.22,12.08 IC25.13 | 105.09,12.08 129.22,12.08 | IC47.13 153.35,12.08 129.22,12.08 | v6.35,60.34 6.35,52.4 16.19,52.4 16.51,52.08 v35.24,52.08
-REG-LD-LO  (via drill 0.25)
  Top 0.127: X1.B18 8.89,62.56 11.43,62.56 v11.43,61.92 | v39.05,57.16 40.96,55.26 v40.96,40.02 | v61.28,40.02 61.91,39.38 v61.91,25.41 | v88.58,23.51 89.22,22.87 89.22,11.44 IC1.10
  Bottom 0.127: IC1.10 91.76,8.9 98.42,8.9 99.06,9.54 102.87,9.54 103.5,8.9 112.71,8.9 | IC15.10 112.71,8.9 | 136.84,8.9 IC25.10 | 112.71,8.9 136.84,8.9 | IC47.10 160.97,8.9 136.84,8.9 | v11.43,61.92 13.65,59.7 20,59.7 22.54,57.16 v39.05,57.16 | v61.28,40.02 v40.96,40.02 | v61.91,25.41 86.68,25.41 v88.58,23.51
-REG-RD-HI  (via drill 0.25)
  Top 0.127: v52.39,55.26 53.34,54.3 IC26.5 | v43.5,60.34 45.72,58.11 IC26.13 | IC2.13 41.59,104.15 41.59,91.14 39.69,89.23 39.69,86.37 39.05,85.74 v39.05,60.34
  Bottom 0.127: IC2.5 IC2.13 | IC26.13 47.94,55.26 v52.39,55.26 | X1.B19 8.89,62.56 13.97,62.56 16.19,60.34 v39.05,60.34 v43.5,60.34
-REG-RD-LO  (via drill 0.25)
  Top 0.127: IC2.10 IC2.2 | X1.B17 8.89,57.48 11.75,57.48 v11.75,54.62 | v43.81,53.99 45.72,52.08 IC26.2 | v37.15,97.17 33.97,97.17 33.97,62.24 33.34,61.61 v33.34,56.53
  Route15 0.127: IC26.10 IC26.2
  Bottom 0.127: v11.75,54.62 25.72,54.62 26.04,54.94 31.75,54.94 | 31.75,54.94 37.78,54.94 38.73,53.99 v43.81,53.99 | IC2.2 42.23,97.17 v37.15,97.17 | 31.75,54.94 v33.34,56.53
-REG-UP  (via drill 0.25)
  Top 0.127: v33.66,16.84 33.66,8.27 33.97,7.95 33.97,5.41 v38.42,0.97
  Bottom 0.127: IC1.2 84.14,4.46 88.58,4.46 | 105.09,4.46 88.58,4.46 | IC15.2 105.09,4.46 | 129.22,4.46 IC25.2 | 105.09,4.46 129.22,4.46 | IC47.2 153.35,4.46 129.22,4.46 | X1.B22 6.35,70.18 4.76,70.18 3.81,69.23 3.81,42.24 5.4,42.24 6.35,41.29 6.35,39.7 7.94,39.7 8.89,38.75 8.89,37.8 8.57,37.8 7.94,37.16 7.3,37.16 6.35,36.21 6.35,32.08 4.76,32.08 3.81,31.13 3.81,27 5.4,27 6.35,26.05 6.35,19.38 19.68,19.38 22.23,16.84 v33.66,16.84 | v38.42,0.97 81.28,0.97 81.6,0.65 87.63,0.65 88.58,1.6 88.58,4.46
-RESET  (via drill 0.25)
  Top 0.127: IC34.2 45.4,12.08 45.4,17.47 44.77,18.11 44.77,52.4 42.86,54.3 v42.86,55.26 | v28.26,89.55 v28.26,59.07
  Bottom 0.127: v42.86,55.26 39.05,59.07 v28.26,59.07 | v28.26,89.55 26.99,90.82 11.11,90.82 X1.C30
-RLD0  (via drill 0.25)
  Top 0.127: v28.26,54.3 28.89,54.94 28.89,100.34 15.88,113.36 8.89,113.36 8.89,110.82 J2.1
  Bottom 0.127: IC32.12 26.04,54.3 v28.26,54.3
-RRD0  (via drill 0.25)
  Top 0.127: v22.54,53.99 23.81,52.72 23.81,41.6 25.08,40.34 25.08,37.8 23.5,36.21 v23.5,14.94
  Route2 0.127: IC32.4 20,53.99 v22.54,53.99
  Bottom 0.127: v23.5,14.94 23.18,14.62 9.84,14.62 1.27,6.04 1.27,2.87 J1.1
-VMA  (via drill 0.25)
  Top 0.127: v26.99,45.1 v26.99,35.57
  Bottom 0.127: IC40.2 44.13,35.57 v26.99,35.57 | v26.99,45.1 14.92,45.1 13.97,46.05 X1.C12
ADATA0  (via drill 0.25)
  Top 0.127: RN1.2 73.98,13.35 76.52,13.35 v76.52,18.43 | v68.9,90.18 69.85,89.23 IC3.15 | IC7.9 90.49,107.33 v90.49,108.6 | IC9.15 v98.11,108.6 | 150.18,106.06 157.8,106.06 157.8,109.87 IC29.15 | 150.18,106.06 v149.86,106.06 | v62.87,92.09 62.55,92.41 62.55,103.2 v65.72,106.38 | 150.18,106.06 v150.18,80.66 | IC19.15 129.22,24.14 v129.22,33.03 | v122.56,34.3 122.87,34.62 122.87,63.51 120.97,65.42 120.97,73.67 120.33,74.31 v120.33,78.12
  Route15 0.127: v119.06,20.97 120.02,20.97 123.83,24.78 126.68,24.78 IC19.15
  Bottom 0.127: v76.52,18.43 77.15,19.06 93.34,19.06 95.25,20.97 v119.06,20.97 | IC13.9 115.89,80.66 120.33,80.66 | 120.33,80.66 v150.18,80.66 171.13,80.66 IC45.9 | IC35.18 46.04,90.18 66.36,90.18 | v68.9,90.18 66.36,90.18 | IC23.9 147.64,106.06 v149.86,106.06 | IC29.15 156.53,108.6 v98.11,108.6 v90.49,108.6 84.77,108.6 84.14,107.96 67.31,107.96 v65.72,106.38 | 66.36,90.18 66.36,92.09 v62.87,92.09 | v129.22,33.03 127.95,34.3 v122.56,34.3 | 120.33,80.66 v120.33,78.12
ADATA1  (via drill 0.25)
  Top 0.127: v119.06,7 125.73,13.67 IC19.1 120.33,15.57 120.33,32.4 120.97,33.03 120.97,47 v122.24,48.27 | IC7.7 83.5,105.42 v83.5,106.69 | v98.11,107.96 99.06,107.01 IC9.1 | IC3.1 67.31,81.29 65.72,82.88 v65.72,90.82 65.72,105.74 v66.67,106.69 | IC29.1 151.45,98.44 v151.45,76.85 | v108.27,64.78 108.27,78.12 IC13.7
  Route2 0.127: v122.24,48.27 122.24,51.77 112.71,61.29 112.71,61.92 109.86,64.78 v108.27,64.78
  Bottom 0.127: RN1.3 66.36,8.27 74.3,8.27 75.56,7 v119.06,7 | v98.11,107.96 84.77,107.96 v83.5,106.69 v66.67,106.69 | IC23.7 142.56,102.88 155.89,102.88 IC29.1 | IC3.1 68.9,80.66 98.11,80.66 | 98.11,80.66 107.63,80.66 IC13.7 | IC45.7 165.42,76.85 v151.45,76.85 99.06,76.85 98.11,77.8 98.11,80.66 | IC35.17 47.94,90.82 v65.72,90.82
ADATA2  (via drill 0.25)
  Top 0.127: RN1.4 63.18,7.63 v63.18,14.62 | IC19.10 140.97,22.24 v139.06,20.33 139.38,20.01 139.38,13.35 140.65,12.08 141.92,12.08 v141.92,8.27 | IC45.5 163.51,80.02 v163.51,106.69 163.51,112.72 164.47,113.68 172.72,113.68 IC29.10 176.85,107.96 176.85,14.62 v171.13,8.9 | v103.82,81.93 104.14,81.61 IC13.5 | v76.52,97.17 79.06,97.17 79.06,101.3 80.96,103.2 80.96,105.74 80.64,106.06 77.47,106.06 IC7.5 | IC9.10 115.25,111.14 v115.25,103.2
  Route15 0.127: IC3.10 78.42,90.82 78.42,95.26 v76.52,97.17
  Bottom 0.127: v63.18,14.62 66.36,17.79 88.9,17.79 89.53,17.16 92.08,17.16 95.25,20.33 120.02,20.33 121.28,21.6 124.46,21.6 125.73,20.33 v139.06,20.33 | IC3.10 84.14,85.1 90.81,85.1 93.98,81.93 v103.82,81.93 | IC35.16 47.94,97.8 66.04,97.8 66.67,97.17 v76.52,97.17 | 115.25,102.88 79.06,102.88 IC7.5 | 115.25,102.88 134.3,102.88 IC23.5 138.11,106.69 150.5,106.69 151.13,106.06 154.31,106.06 154.94,106.69 v163.51,106.69 | 115.25,102.88 v115.25,103.2 | v141.92,8.27 143.19,7 166.05,7 167.96,8.9 v171.13,8.9
ADATA3  (via drill 0.25)
  Top 0.127: v116.84,107.96 IC9.9 | v148.91,23.19 151.13,25.41 151.13,57.8 151.76,58.43 151.76,64.78 151.45,65.1 151.45,75.26 153.67,77.48 157.48,77.48 IC45.3 | RN1.5 60.64,7.63 60.64,50.81 62.55,52.72 62.55,72.4 63.18,73.04 v63.18,78.75 | v84.77,81.29 85.09,81.61 IC3.9 | v98.42,82.56 98.42,79.7 IC13.3 99.06,83.83 97.47,85.42 97.47,99.71 96.84,100.34 v96.84,106.06 | IC35.15 49.21,94.63 v49.21,80.02
  Bottom 0.127: IC7.3 73.98,106.06 v96.84,106.06 105.09,106.06 105.73,106.69 116.84,106.69 | 116.84,106.69 120.65,106.69 121.28,106.06 129.22,106.06 IC23.3 134.3,107.96 171.13,107.96 IC29.9 | 116.84,106.69 v116.84,107.96 | v148.91,23.19 IC19.9 | v84.77,81.29 65.72,81.29 v63.18,78.75 50.48,78.75 v49.21,80.02 | v98.42,82.56 97.79,83.2 93.34,83.2 89.85,86.69 IC3.9 | IC45.3 155.89,77.48 100.65,77.48 IC13.3
ADATA4  (via drill 0.25)
  Top 0.127: RN1.6 59.37,8.9 59.37,20.65 60.01,21.28 v60.01,70.81 | IC13.18 98.11,87.64 98.11,100.66 98.74,101.3 | 98.74,101.3 101.6,101.3 IC10.15 | IC30.15 160.97,100.34 160.97,105.74 160.66,106.06 158.43,106.06 158.43,87.64 IC45.18 | IC35.14 54.29,99.07 v54.29,104.47 | 98.74,101.3 97.47,102.56 v97.47,111.14 | v62.55,91.45 v62.55,73.04
  Bottom 0.127: v60.01,70.81 61.59,72.4 62.55,72.4 | 62.55,72.4 68.26,72.4 IC4.15 | IC13.18 100.65,85.1 126.68,85.1 IC20.15 130.49,84.47 145.1,84.47 145.73,85.1 155.89,85.1 IC45.18 | v54.29,104.47 57.47,107.64 57.47,113.68 70.8,113.68 | IC7.18 70.8,113.68 | IC23.18 129.22,113.68 97.47,113.68 | 70.8,113.68 97.47,113.68 | 97.47,113.68 v97.47,111.14 | v62.55,73.04 62.55,72.4 | v62.55,91.45 61.28,92.72 53.66,92.72 IC35.14
ADATA5  (via drill 0.25)
  Top 0.127: v162.24,89.86 162.56,89.55 IC45.16 162.24,86.37 v162.24,83.83 | IC20.1 125.41,79.39 v125.41,81.29 | v104.46,83.2 104.14,83.52 IC13.16 | v61.91,5.09 63.82,5.09 63.82,16.84 65.72,18.74 65.72,64.78 IC4.1 66.36,67.32 66.36,81.61 65.09,82.88 v65.09,105.11 | IC35.13 57.47,99.71 v57.47,105.11 | v93.66,109.23 v93.66,92.72
  Route15 0.127: IC10.1 101.92,88.91 102.55,88.91 104.14,87.33 IC13.16
  Bottom 0.127: IC30.1 159.38,89.86 v162.24,89.86 | 124.14,82.56 v125.41,81.29 | 124.14,82.56 105.73,82.56 105.09,83.2 v104.46,83.2 | v162.24,83.83 160.97,82.56 145.41,82.56 145.1,82.25 136.53,82.25 136.21,82.56 124.14,82.56 | RN1.7 55.56,5.73 55.88,5.73 56.52,5.09 v61.91,5.09 | v57.47,105.11 62.87,110.5 65.09,110.5 | 75.88,110.5 65.09,110.5 | IC7.16 75.88,110.5 | IC23.16 134.3,110.5 93.66,110.5 | 75.88,110.5 93.66,110.5 | 65.09,110.5 v65.09,105.11 | IC10.1 98.11,92.72 v93.66,92.72 | 93.66,110.5 v93.66,109.23
ADATA6  (via drill 0.25)
  Top 0.127: v145.1,85.1 v145.1,89.55 145.1,107.96 IC23.14 | IC45.14 167.32,87.01 v167.32,88.91 | RN1.8 54.93,9.54 54.93,21.28 56.83,23.19 v56.83,55.26 | v84.14,56.53 84.14,72.08 83.5,72.72 | 83.5,72.72 82.55,73.67 IC4.10 | 83.5,93.99 v82.23,93.99 | 83.5,72.72 83.5,93.99 | IC7.14 81.6,111.14 81.6,102.56 83.5,100.66 83.5,93.99
  Route2 0.127: IC13.14 113.35,90.82 v113.35,94.63 113.35,98.44 IC10.10
  Route15 0.127: IC45.14 171.77,90.82 171.77,98.44 IC30.10
  Bottom 0.127: IC20.10 142.56,85.1 v145.1,85.1 | v167.32,88.91 167,89.23 153.03,89.23 152.72,89.55 v145.1,89.55 145.1,94.63 123.83,94.63 122.56,93.36 120.65,93.36 119.38,94.63 v113.35,94.63 112.71,95.26 90.49,95.26 89.22,93.99 v82.23,93.99 73.98,93.99 73.34,93.36 58.1,93.36 IC35.12 | v56.83,55.26 66.04,55.26 67.31,56.53 v84.14,56.53
ADATA7  (via drill 0.25)
  Top 0.127: v118.75,88.28 118.75,97.48 IC10.9 117.79,100.34 v117.79,109.23 | IC45.12 173.04,87.01 173.04,89.86 174.31,91.14 174.31,98.44 IC30.9 | v55.88,5.09 61.28,5.09 61.28,20.65 65.09,24.46 65.09,70.18 64.45,70.81 v64.45,73.04 | IC35.11 59.37,94.63 v59.37,73.99 | IC7.12 89.22,113.68 94.3,113.68 94.3,112.09 | 94.3,112.09 94.3,88.59 94.93,87.96 94.93,76.85 v93.66,75.58 | 94.3,112.09 v96.84,109.55
  Bottom 0.127: IC13.12 115.89,88.28 v118.75,88.28 141.92,88.28 IC20.9 145.1,88.28 171.13,88.28 IC45.12 | IC23.12 147.64,113.68 175.9,113.68 176.21,113.36 176.21,106.06 172.09,106.06 171.77,105.74 171.77,100.98 173.67,100.98 IC30.9 | RN1.9 51.12,5.09 v55.88,5.09 | 64.45,73.99 64.45,75.58 83.5,75.58 IC4.9 86.68,75.58 v93.66,75.58 | 64.45,73.99 v64.45,73.04 | 64.45,73.99 v59.37,73.99 | v117.79,109.23 117.47,109.55 v96.84,109.55
ADATA8  (via drill 0.25)
  Top 0.127: IC37.18 40.64,73.04 41.59,73.99 41.59,81.93 IC36.18 | IC8.9 87.31,91.45 v87.31,84.47 87.95,83.83 v87.95,67.96 | RN2.2 45.4,4.46 66.36,4.46 66.36,12.39 68.9,14.94 68.9,30.17 69.85,31.13 IC5.15 | IC24.9 146.05,75.58 | 146.05,75.58 146.05,72.4 149.22,72.4 149.54,72.08 149.54,64.47 v151.13,62.88 151.13,58.43 150.5,57.8 v150.5,33.03 | IC46.9 172.4,28.59 v172.4,31.13 | 146.05,75.58 v145.73,75.58 | IC14.9 115.89,67.96 v115.89,68.59 | v91.76,38.75 v91.76,55.26 v91.76,64.15 | v101.28,59.07 101.6,59.38 IC11.15
  Route15 0.127: IC11.15 104.46,64.15 112.08,64.15 IC14.9
  Bottom 0.127: v87.31,84.47 84.77,81.93 65.41,81.93 64.14,80.66 45.72,80.66 45.09,81.29 42.23,81.29 IC36.18 | IC43.15 158.43,62.88 v151.13,62.88 | v172.4,31.13 170.5,33.03 v150.5,33.03 | v145.73,75.58 129.86,75.58 IC21.15 127.95,73.99 124.46,70.5 117.79,70.5 v115.89,68.59 | IC5.15 71.44,37.48 87.31,37.48 88.58,38.75 v91.76,38.75 | v91.76,55.26 95.89,55.26 99.69,59.07 v101.28,59.07 | v91.76,64.15 v87.95,67.96
ADATA9  (via drill 0.25)
  Top 0.127: IC11.1 99.38,53.99 v99.38,55.89 | v108.27,57.8 108.27,64.15 109.22,65.1 IC14.7 | v125.09,93.99 124.78,93.67 124.78,67.32 IC21.1 124.78,65.42 124.78,53.35 124.14,52.72 v124.14,31.13 | IC43.1 155.89,52.08 155.89,34.62 156.53,33.98 v156.53,29.86 | RN2.3 40.32,7 40.32,26.68 | 40.32,26.68 40.32,36.84 41.59,38.11 41.59,59.07 43.5,60.97 44.13,60.97 44.13,69.23 | IC37.17 44.13,69.23 | 40.32,26.68 v42.55,26.68 | IC36.17 44.13,81.93 44.13,69.23 | IC8.7 82.23,91.45 v82.23,88.28
  Bottom 0.127: v99.38,55.89 101.28,57.8 v108.27,57.8 | IC21.1 124.14,67.96 110.81,67.96 IC14.7 | IC24.7 138.75,93.99 v125.09,93.99 | IC46.7 166.05,29.86 v156.53,29.86 124.14,29.86 | v42.55,26.68 65.72,26.68 IC5.1 68.9,29.86 124.14,29.86 | v82.23,88.28 61.91,88.28 59.37,85.74 46.99,85.74 45.72,84.47 44.77,84.47 IC36.17 | 124.14,29.86 v124.14,31.13
ADATA10  (via drill 0.25)
  Top 0.127: v47.94,8.59 52.39,8.59 52.39,27.95 54.29,29.86 54.29,37.8 v55.24,38.75 | IC5.10 82.55,37.8 v82.23,38.11 83.5,39.38 v83.5,67.96 | IC46.5 162.88,28.59 162.88,33.98 163.51,34.62 v163.51,56.53 v163.51,69.86 | v113.98,64.15 114.3,63.83 IC11.10 | IC37.16 46.04,70.5 46.04,73.36 46.67,73.99 46.67,81.93 IC36.16 | v140.02,89.55 140.02,74.94 IC21.10 140.97,70.5 v140.02,69.55 | v76.52,85.1 76.52,90.82 IC8.5
  Bottom 0.127: RN2.4 40.01,8.59 v47.94,8.59 | v55.24,38.75 66.67,38.75 67.31,38.11 v82.23,38.11 | v163.51,56.53 166.69,59.7 171.13,59.7 IC43.10 | IC8.5 79.06,90.18 134.3,90.18 | IC24.5 134.3,90.18 | v140.02,89.55 139.38,90.18 134.3,90.18 | IC36.16 47.94,85.1 v76.52,85.1 | v163.51,69.86 140.34,69.86 v140.02,69.55 127.32,69.55 127.32,65.73 126.36,64.78 117.16,64.78 116.52,64.15 v113.98,64.15 106.36,64.15 IC14.5 102.55,67.96 89.53,67.96 88.9,68.59 84.14,68.59 v83.5,67.96
ADATA11  (via drill 0.25)
  Top 0.127: IC37.15 48.26,73.04 49.21,73.99 49.21,79.39 48.26,80.34 IC36.15 | v172.72,25.41 176.21,25.41 176.21,60.34 IC43.9 | IC21.9 143.83,73.67 143.83,68.27 v144.46,67.64 | RN2.5 35.24,7 v35.24,26.36 | v83.19,31.13 85.09,33.03 IC5.9 | IC14.3 100.01,65.42 v100.01,58.43 100.01,51.77 97.47,49.23 v97.47,38.75 | v116.52,59.07 116.52,60.97 IC11.9 116.84,63.83 v117.16,64.15 | v123.51,64.15 v123.51,92.72
  Route2 0.127: IC36.15 51.75,86.37 64.77,86.37 67.94,89.55 69.85,89.55 72.07,91.77 IC8.3
  Bottom 0.127: IC8.3 73.98,93.36 120.02,93.36 120.65,92.72 v123.51,92.72 124.46,92.72 125.09,93.36 129.22,93.36 IC24.3 | IC46.3 160.34,25.41 v172.72,25.41 | 144.46,64.47 144.46,63.51 173.04,63.51 IC43.9 | 144.46,64.47 v144.46,67.64 | v35.24,26.36 36.83,27.95 55.24,27.95 55.88,27.32 64.14,27.32 67.94,31.13 v83.19,31.13 | v97.47,38.75 92.39,38.75 91.12,37.48 87.95,37.48 86.36,35.89 IC5.9 | v116.52,59.07 115.89,58.43 v100.01,58.43 | 144.46,64.47 126.68,64.47 126.36,64.15 v123.51,64.15 v117.16,64.15
ADATA12  (via drill 0.25)
  Top 0.127: v33.02,22.55 RN2.6 | IC44.15 159.07,47.64 159.07,39.38 157.48,37.8 IC46.18 | IC37.14 51.12,70.5 51.12,73.36 51.75,73.99 51.75,81.93 IC36.14 51.75,83.83 51.75,89.23 57.47,94.94 v57.47,98.44 | v100.01,100.66 100.01,74.94 IC14.18 99.06,72.4 97.47,70.81 97.47,51.45 v98.11,50.81 | v101.28,50.81 101.28,48.91 IC12.15 101.6,44.78 v101.92,44.46 | IC22.15 129.22,36.84 v129.22,42.88 | v62.55,22.55 62.55,42.24 v62.23,42.56
  Bottom 0.127: v33.02,22.55 v62.55,22.55 65.72,22.55 66.67,21.6 68.26,21.6 IC6.15 | IC22.15 129.86,34.3 155.89,34.3 IC46.18 | 100.01,100.98 129.22,100.98 IC24.18 | 100.01,100.98 73.98,100.98 IC8.18 70.8,97.8 66.67,97.8 66.04,98.44 v57.47,98.44 | 100.01,100.98 v100.01,100.66 | v98.11,50.81 v101.28,50.81 | v129.22,42.88 127.64,44.46 v101.92,44.46 62.23,44.46 v62.23,42.56
ADATA13  (via drill 0.25)
  Top 0.127: v119.7,96.53 v119.7,75.58 | IC22.1 124.78,29.22 v124.78,38.75 | IC36.13 54.29,81.93 54.29,71.13 IC37.13 54.29,69.23 54.29,40.34 52.39,38.43 52.39,28.59 51.75,27.95 51.75,10.49 50.48,9.22 47.31,9.22 v47.31,7.95 | v64.45,8.27 65.72,9.54 65.72,13.98 IC6.1 | IC12.1 98.11,40.02 98.11,38.75 | 98.11,38.75 98.11,30.17 97.47,29.54 v97.47,17.16 | 98.11,38.75 v99.38,38.75
  Route15 0.127: IC44.1 IC46.16 | IC8.16 71.44,93.36 66.99,93.36 58.1,84.47 54.93,84.47 IC36.13
  Bottom 0.127: IC8.16 79.06,97.8 119.7,97.8 | 119.7,97.8 134.3,97.8 IC24.16 | IC14.16 105.73,75.58 v119.7,75.58 | 119.7,97.8 v119.7,96.53 | IC44.1 155.26,38.75 153.99,38.75 153.35,39.38 140.97,39.38 140.34,38.75 v124.78,38.75 v99.38,38.75 | RN2.7 32.07,5.09 46.35,5.09 48.58,7.32 48.58,7.95 | 48.58,7.95 48.58,8.27 v64.45,8.27 | v97.47,17.16 92.71,17.16 92.08,16.52 86.36,16.52 85.72,17.16 68.9,17.16 IC6.1 | 48.58,7.95 v47.31,7.95
ADATA14  (via drill 0.25)
  Top 0.127: v167.64,38.11 IC46.14 | IC37.12 56.83,71.13 56.83,81.93 IC36.12 | RN2.8 28.26,7 28.26,12.39 31.43,15.57 v31.43,20.01 | IC8.14 81.6,98.44 81.6,94.63 | 81.6,71.45 81.6,24.14 IC6.10 | 81.6,71.45 v81.6,82.56 81.6,94.63 | 81.6,71.45 v83.5,71.45 | 81.6,94.63 v82.87,94.63 | v119.7,72.4 v119.7,47.64
  Route2 0.127: 117.47,45.41 121.6,41.29 v121.6,38.11 | 117.47,45.41 IC12.10 | v119.7,47.64 117.47,45.41
  Bottom 0.127: IC22.10 142.56,37.48 148.27,37.48 | 148.27,37.48 151.13,37.48 151.76,38.11 v167.64,38.11 172.09,38.11 173.67,39.7 173.67,48.59 IC44.10 | v121.6,38.11 140.34,38.11 140.97,38.75 147,38.75 148.27,37.48 | v31.43,20.01 41.59,20.01 42.86,21.28 47.94,21.28 48.58,21.92 65.72,21.92 66.67,20.97 80.33,20.97 IC6.10 | 107.63,72.4 IC14.14 | 107.63,72.4 103.5,72.4 102.55,73.36 102.55,75.58 98.42,75.58 97.47,74.62 97.47,72.4 84.45,72.4 v83.5,71.45 | IC24.14 138.11,96.53 123.19,96.53 122.56,95.9 114.62,95.9 113.98,96.53 96.52,96.53 95.89,95.9 90.49,95.9 89.22,94.63 v82.87,94.63 | IC36.12 57.47,81.29 61.59,81.29 62.87,82.56 v81.6,82.56 | 107.63,72.4 v119.7,72.4
ADATA15  (via drill 0.25)
  Top 0.127: RN2.9 27.62,8.9 v27.62,9.86 | IC44.9 174.94,48.27 174.94,42.88 173.67,41.6 173.67,36.84 IC46.12 | IC36.11 57.47,81.93 57.47,71.13 IC37.11 59.37,69.23 v59.37,21.28 | IC8.12 87.63,93.99 88.58,93.04 v88.58,71.77 | v117.79,50.81 117.79,67.96 v114.62,71.13 114.62,73.67 IC14.12 113.35,74.94 113.35,93.36 v115.25,95.26 | v151.76,50.81 v151.76,37.48
  Route2 0.127: IC12.9 117.79,49.54 v117.79,50.81
  Bottom 0.127: v27.62,9.86 29.21,11.44 40.32,11.44 44.77,15.89 59.69,15.89 62.23,18.43 | 62.23,18.43 63.5,19.7 81.6,19.7 IC6.9 | IC22.9 144.46,36.84 151.13,36.84 v151.76,37.48 171.13,37.48 IC46.12 | 88.27,71.45 87.63,70.81 80.33,70.81 79.69,71.45 65.09,71.45 63.82,70.18 IC37.11 | 88.27,71.45 v88.58,71.77 | v114.62,71.13 113.98,70.5 89.53,70.5 88.58,71.45 88.27,71.45 | IC24.12 141.92,95.26 v115.25,95.26 | v117.79,50.81 v151.76,50.81 | v59.37,21.28 62.23,18.43
ADDR0  (via drill 0.25)
  Top 0.127: v95.57,38.11 94.3,39.38 94.3,57.48 93.66,58.11 v93.66,60.34 | IC49.18 153.35,69.86 153.35,60.02 v153.03,59.7 | v131.13,59.07 130.81,59.38 IC27.18 | v3.17,21.28 3.17,16.2 v12.06,7.32 | v93.34,5.73 98.11,10.49 98.11,29.54 99.06,30.49 IC17.18
  Bottom 0.127: IC17.18 96.84,38.11 v95.57,38.11 | 91.12,62.88 v93.66,60.34 | 91.12,62.88 73.98,62.88 IC41.18 | IC27.18 129.22,62.88 91.12,62.88 | v153.03,59.7 152.4,59.07 v131.13,59.07 | v3.17,21.28 X1.A3 | v12.06,7.32 22.54,7.32 25.4,4.46 78.74,4.46 80.01,5.73 v93.34,5.73
ADDR1  (via drill 0.25)
  Top 0.127: v160.97,62.88 v160.97,72.4 | X1.A4 3.81,24.46 3.81,17.79 v6.03,15.57 | v37.15,15.57 38.42,16.84 v38.42,33.35 | v49.85,59.7 v49.85,33.98
  Route15 0.127: IC17.16 107.63,39.38 107.63,42.88 112.71,47.95 v112.71,55.89
  Bottom 0.127: v112.71,55.89 114.62,57.8 119.38,57.8 121.28,59.7 | 134.3,59.7 121.28,59.7 | IC27.16 134.3,59.7 | 79.06,59.7 IC41.16 | 121.28,59.7 79.06,59.7 | v160.97,72.4 IC49.16 | v160.97,62.88 160.97,59.7 153.67,59.7 153.03,60.34 149.86,60.34 149.22,59.7 134.3,59.7 | v37.15,15.57 v6.03,15.57 | v38.42,33.35 39.05,33.98 v49.85,33.98 | v49.85,59.7 51.12,60.97 65.41,60.97 66.67,59.7 79.06,59.7
ADDR2  (via drill 0.25)
  Top 0.127: IC27.14 142.56,59.7 145.1,59.7 v145.1,64.15 145.73,64.78 145.73,71.13 145.1,71.77 v145.1,82.88 | IC41.14 82.87,60.97 v82.87,59.07 | v95.57,33.67 95.57,37.16 96.2,37.8 96.2,57.16 95.25,57.16 v94.3,58.11 94.3,59.38 94.93,60.02 94.93,68.91 97.79,71.77 97.79,83.2 v98.42,83.83 | v109.54,33.67 109.22,33.98 IC17.14 | v32.07,26.68 33.97,28.59 v33.97,50.81 | v47.94,52.72 48.58,53.35 v48.58,55.89
  Bottom 0.127: v145.1,64.15 147,66.05 149.86,66.05 152.4,68.59 169.54,68.59 173.67,72.72 173.67,75.58 169.23,75.58 IC49.14 | v94.3,58.11 83.82,58.11 v82.87,59.07 81.6,57.8 63.5,57.8 61.59,55.89 v48.58,55.89 | v109.54,33.67 v95.57,33.67 | X1.A5 6.35,27 23.81,27 24.13,26.68 v32.07,26.68 | v33.97,50.81 34.61,51.45 41.91,51.45 43.18,52.72 v47.94,52.72 | v145.1,82.88 144.78,83.2 105.73,83.2 105.09,83.83 v98.42,83.83
ADDR3  (via drill 0.25)
  Top 0.127: IC27.12 146.37,61.61 v146.37,66.05 | IC41.12 87.95,60.97 87.95,55.89 | 87.95,55.89 87.95,55.57 89.22,54.3 v89.22,36.84 | 87.95,55.89 v87.31,55.89 | v158.43,69.23 158.43,39.38 156.53,37.48 156.53,34.62 157.16,33.98 v157.16,32.4
  Route2 0.127: v15.88,33.67 15.88,35.57 15.56,35.89 15.56,39.06 24.13,47.64 26.04,47.64 v33.97,55.57
  Bottom 0.127: v146.37,66.05 147,66.69 149.86,66.69 152.4,69.23 v158.43,69.23 167.96,69.23 IC49.12 | v89.22,36.84 91.76,34.3 112.71,34.3 IC17.12 117.79,32.4 v157.16,32.4 | X1.A6 5.71,31.44 6.67,31.44 7.3,32.08 10.79,32.08 12.38,33.67 v15.88,33.67 | v33.97,55.57 34.29,55.89 41.59,55.89 42.86,54.62 66.04,54.62 67.31,55.89 v87.31,55.89
ADDR4  (via drill 0.25)
  Top 0.127: IC27.9 145.1,52.72 v145.1,46.37 144.46,45.73 v144.46,26.05 | v171.77,45.1 171.77,65.42 IC49.9 | X1.A7 6.35,34.62 11.75,34.62 11.75,36.84 12.7,37.8 v12.7,46.68 | v93.66,47.64 v93.66,46.37 | v115.25,26.05 114.3,27 IC17.9
  Route2 0.127: IC41.9 v93.66,47.64 96.52,47.64 103.19,40.97 103.19,40.34 106.68,36.84 107.31,36.84 108.27,35.89 108.27,34.3 IC17.9
  Bottom 0.127: v145.1,46.37 146.37,45.1 v171.77,45.1 | v12.7,46.68 13.65,47.64 66.04,47.64 66.67,47 78.74,47 79.38,46.37 v93.66,46.37 | v115.25,26.05 v144.46,26.05
ADDR5  (via drill 0.25)
  Top 0.127: IC27.7 141.29,53.99 v141.29,57.8 | v167.32,62.88 167.64,63.2 IC49.7 | X1.A8 6.35,37.16 11.43,37.16 v11.43,38.75 | v38.42,38.75 40.64,38.75 v40.64,37.8 | v114.62,57.16 115.25,56.53 115.25,43.83 v114.62,43.19
  Route2 0.127: IC41.7 86.68,49.54 86.68,47.64 98.11,36.21 98.11,35.25 99.06,34.3 | 99.06,34.3 103.5,29.86 107.63,29.86 IC17.7 | 99.06,34.3 v97.16,32.4
  Route15 0.127: v114.62,43.19 112.71,41.29 112.71,31.76 IC17.7
  Bottom 0.127: v167.32,62.88 166.69,62.88 166.69,60.66 163.83,57.8 v141.29,57.8 140.65,58.43 123.19,58.43 121.92,57.16 v114.62,57.16 | v38.42,38.75 v11.43,38.75 | v40.64,37.8 41.59,38.75 51.44,38.75 52.39,37.8 52.39,35.25 65.72,35.25 68.58,32.4 v97.16,32.4
ADDR6  (via drill 0.25)
  Top 0.127: IC17.5 103.19,27.32 v103.19,26.05 | v91.12,52.08 91.12,26.68 v91.76,26.05 v91.76,5.09 | v1.27,38.43 0.64,37.8 0.64,12.08 6.03,6.68 12.06,6.68 v12.06,4.78
  Bottom 0.127: v91.76,26.05 v103.19,26.05 | IC41.5 77.79,53.67 79.38,52.08 v91.12,52.08 134.3,52.08 IC27.5 137.48,55.26 154.31,55.26 154.94,55.89 176.21,55.89 176.21,62.56 174.62,64.15 164.78,64.15 IC49.5 | v1.27,38.43 X1.A9 | v12.06,4.78 12.7,4.14 25.08,4.14 25.72,3.5 78.42,3.5 80.01,5.09 v91.76,5.09
ADDR7  (via drill 0.25)
  Top 0.127: IC17.3 98.74,27.95 v98.74,25.41 | v87.31,25.41 86.04,26.68 86.04,45.41 84.14,47.32 v84.14,54.94 | IC49.3 154.62,63.51 v154.62,57.16 | X1.A10 6.35,42.24 v11.11,42.24
  Route15 0.127: v66.99,43.83 71.44,48.27 71.44,52.72 IC41.3
  Bottom 0.127: v87.31,25.41 v98.74,25.41 | 83.82,55.26 v84.14,54.94 | 83.82,55.26 74.3,55.26 72.71,53.67 IC41.3 | 129.22,55.26 IC27.3 | 129.22,55.26 96.52,55.26 95.89,54.62 91.44,54.62 90.81,55.26 83.82,55.26 | v154.62,57.16 138.75,57.16 136.84,55.26 129.22,55.26 | v11.11,42.24 11.43,42.56 38.1,42.56 38.73,43.19 40.64,43.19 41.91,41.92 65.09,41.92 v66.99,43.83
ADDR8  (via drill 0.25)
  Top 0.127: v38.42,43.83 40.32,45.73 v40.32,47 | v72.07,45.73 72.39,46.05 IC42.18 | IC50.18 153.99,26.68 v153.99,39.38 | v131.13,43.19 130.81,43.51 IC28.18
  Bottom 0.127: IC18.18 100.65,21.6 120.65,21.6 121.28,22.24 124.46,22.24 125.09,21.6 146.69,21.6 147.32,22.24 151.13,22.24 151.76,21.6 155.89,21.6 IC50.18 | IC42.18 73.98,50.18 129.22,50.18 IC28.18 | X1.A11 6.35,42.24 10.48,42.24 12.06,43.83 v38.42,43.83 | v40.32,47 66.04,47 67.31,45.73 v72.07,45.73 | v153.99,39.38 150.18,43.19 v131.13,43.19
ADDR9  (via drill 0.25)
  Top 0.127: X1.A12 6.35,44.78 11.43,44.78 11.43,42.56 v12.06,41.92
  Route2 0.127: IC18.16 100.65,26.68 92.39,26.68 88.58,30.49 88.58,35.89 83.5,40.97 83.5,41.92 80.96,44.46 | 80.96,44.46 77.47,47.95 IC42.16 | 80.96,44.46 v80.33,43.83
  Route15 0.127: IC50.16 159.07,26.68 157.16,26.68 155.89,27.95 155.89,28.9 147.32,37.48 145.41,37.48 141.92,40.97 141.92,42.56 IC28.16
  Bottom 0.127: IC28.16 134.3,47 79.38,47 77.79,48.59 IC42.16 | v12.06,41.92 12.7,41.29 65.41,41.29 67.94,43.83 v80.33,43.83
ADDR10  (via drill 0.25)
  Top 0.127: v167.64,47 168.59,46.05 168.59,24.14 IC50.14 168.59,22.24 168.59,8.9 v166.69,7 | IC42.14 82.87,48.27 v82.87,45.1 | v98.11,45.1 100.01,43.19 100.01,32.71 100.33,32.4 v100.33,31.76 100.33,29.86 100.65,29.54 100.65,18.74 103.19,16.2 103.19,14.3 103.5,13.98 107.95,13.98 | 107.95,13.98 108.27,13.98 108.27,19.06 109.22,20.01 IC18.14 | X1.A13 6.35,47.32 12.06,47.32 v12.06,43.19 | v28.89,43.19 29.53,42.56 v29.53,34.94 | v109.54,6.36 107.95,7.95 107.95,13.98
  Bottom 0.127: IC28.14 142.56,47 v167.64,47 | v98.11,45.1 v82.87,45.1 | v28.89,43.19 v12.06,43.19 | v29.53,34.94 29.84,34.62 65.72,34.62 68.58,31.76 v100.33,31.76 | v166.69,7 166.05,6.36 v109.54,6.36
ADDR11  (via drill 0.25)